# EAGLE board femtoBeacon_r2.0.1_PANELIZED_5x10 (EAGLE 7.6.0), part 1 of 18
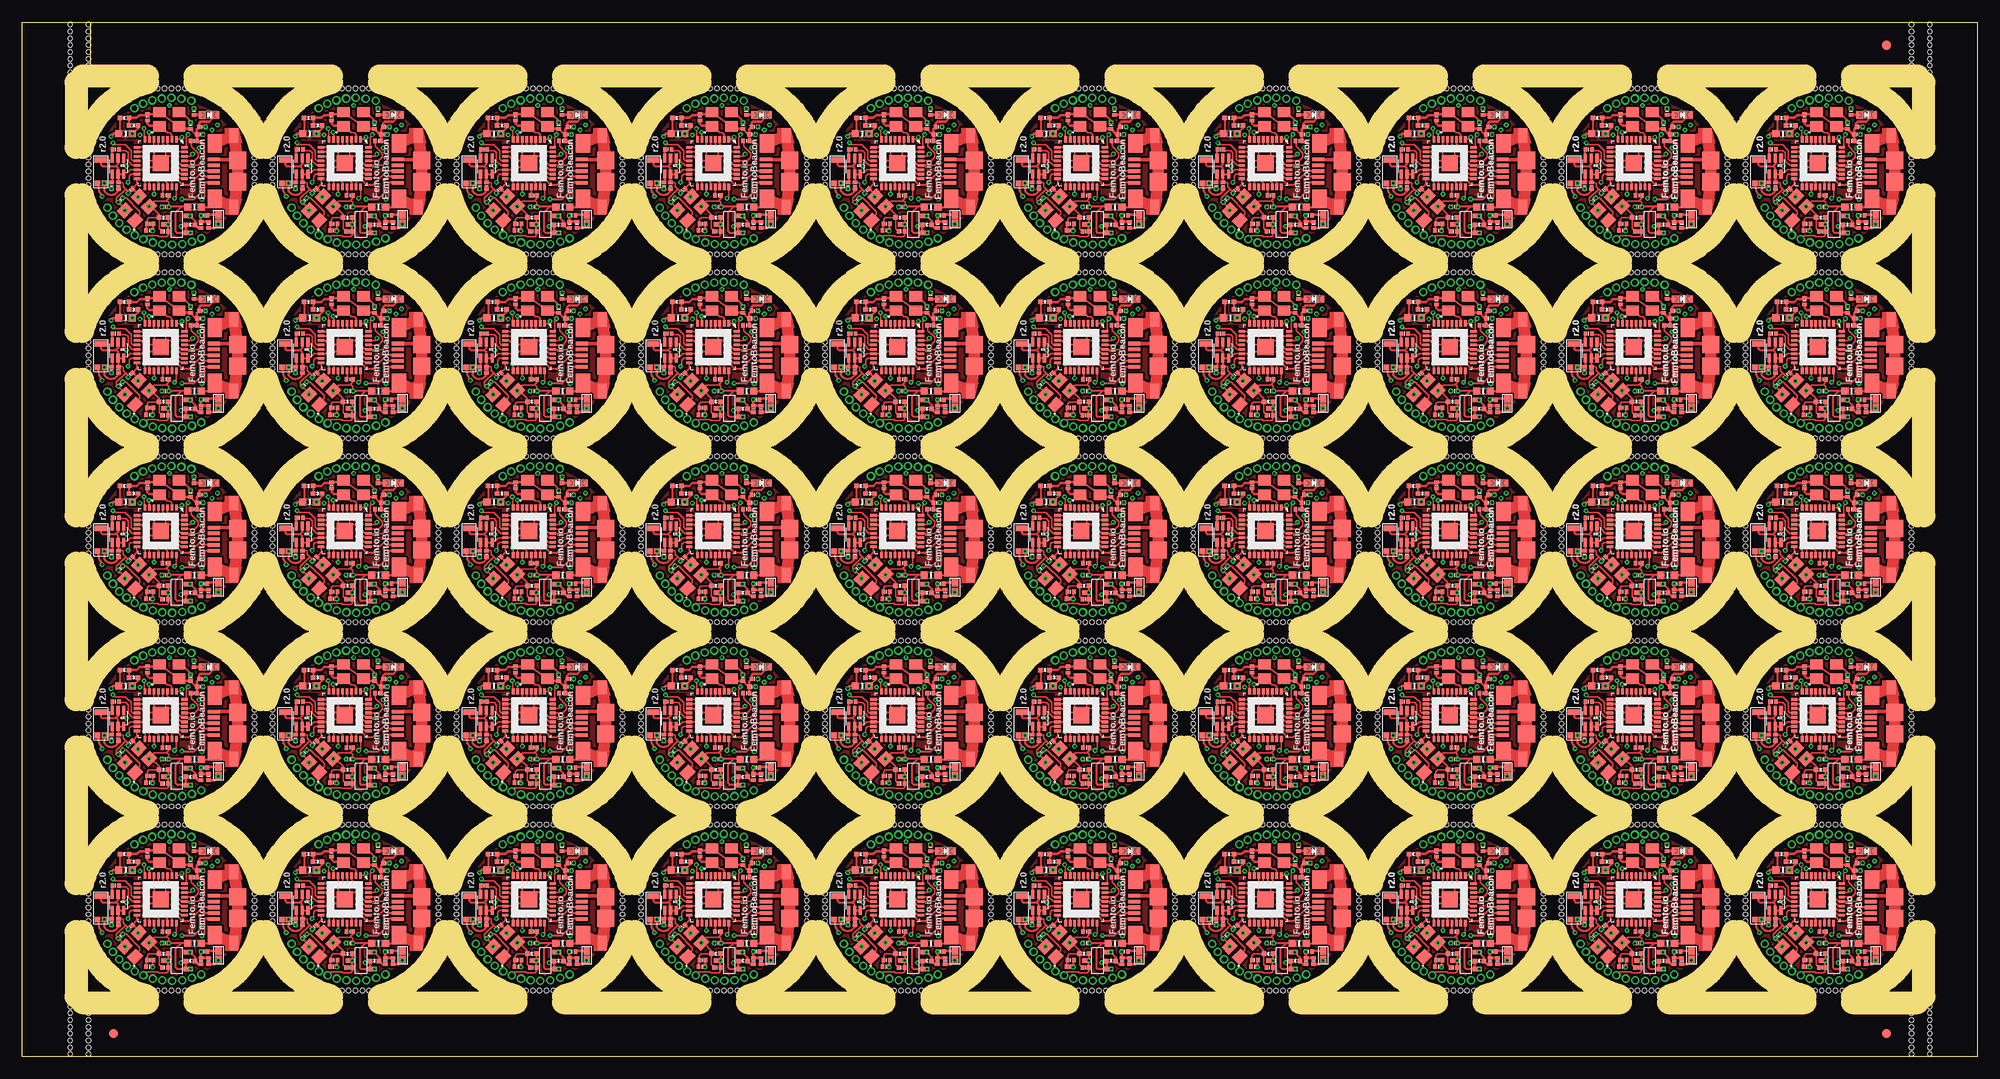
[diagram p0: board, top side]
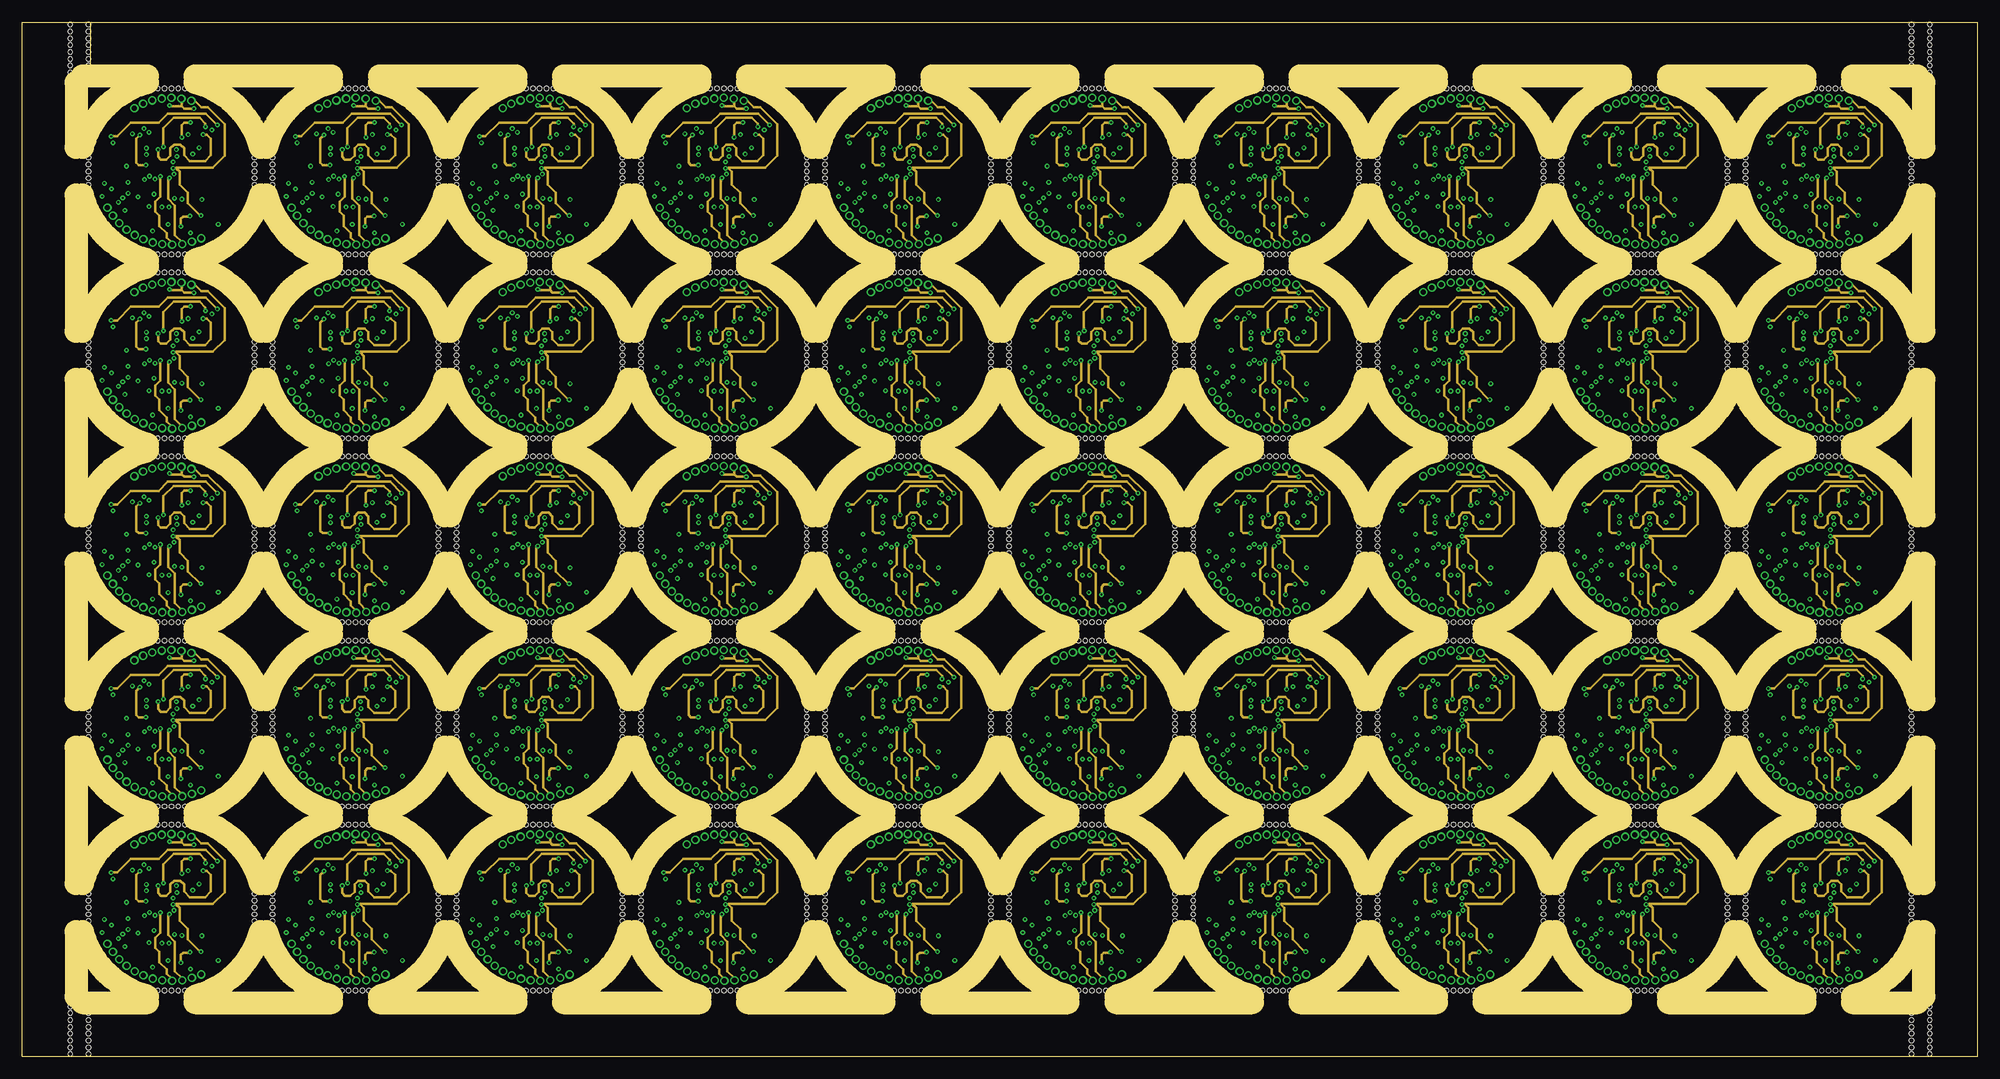
[diagram p1: board, inner layer Route2]
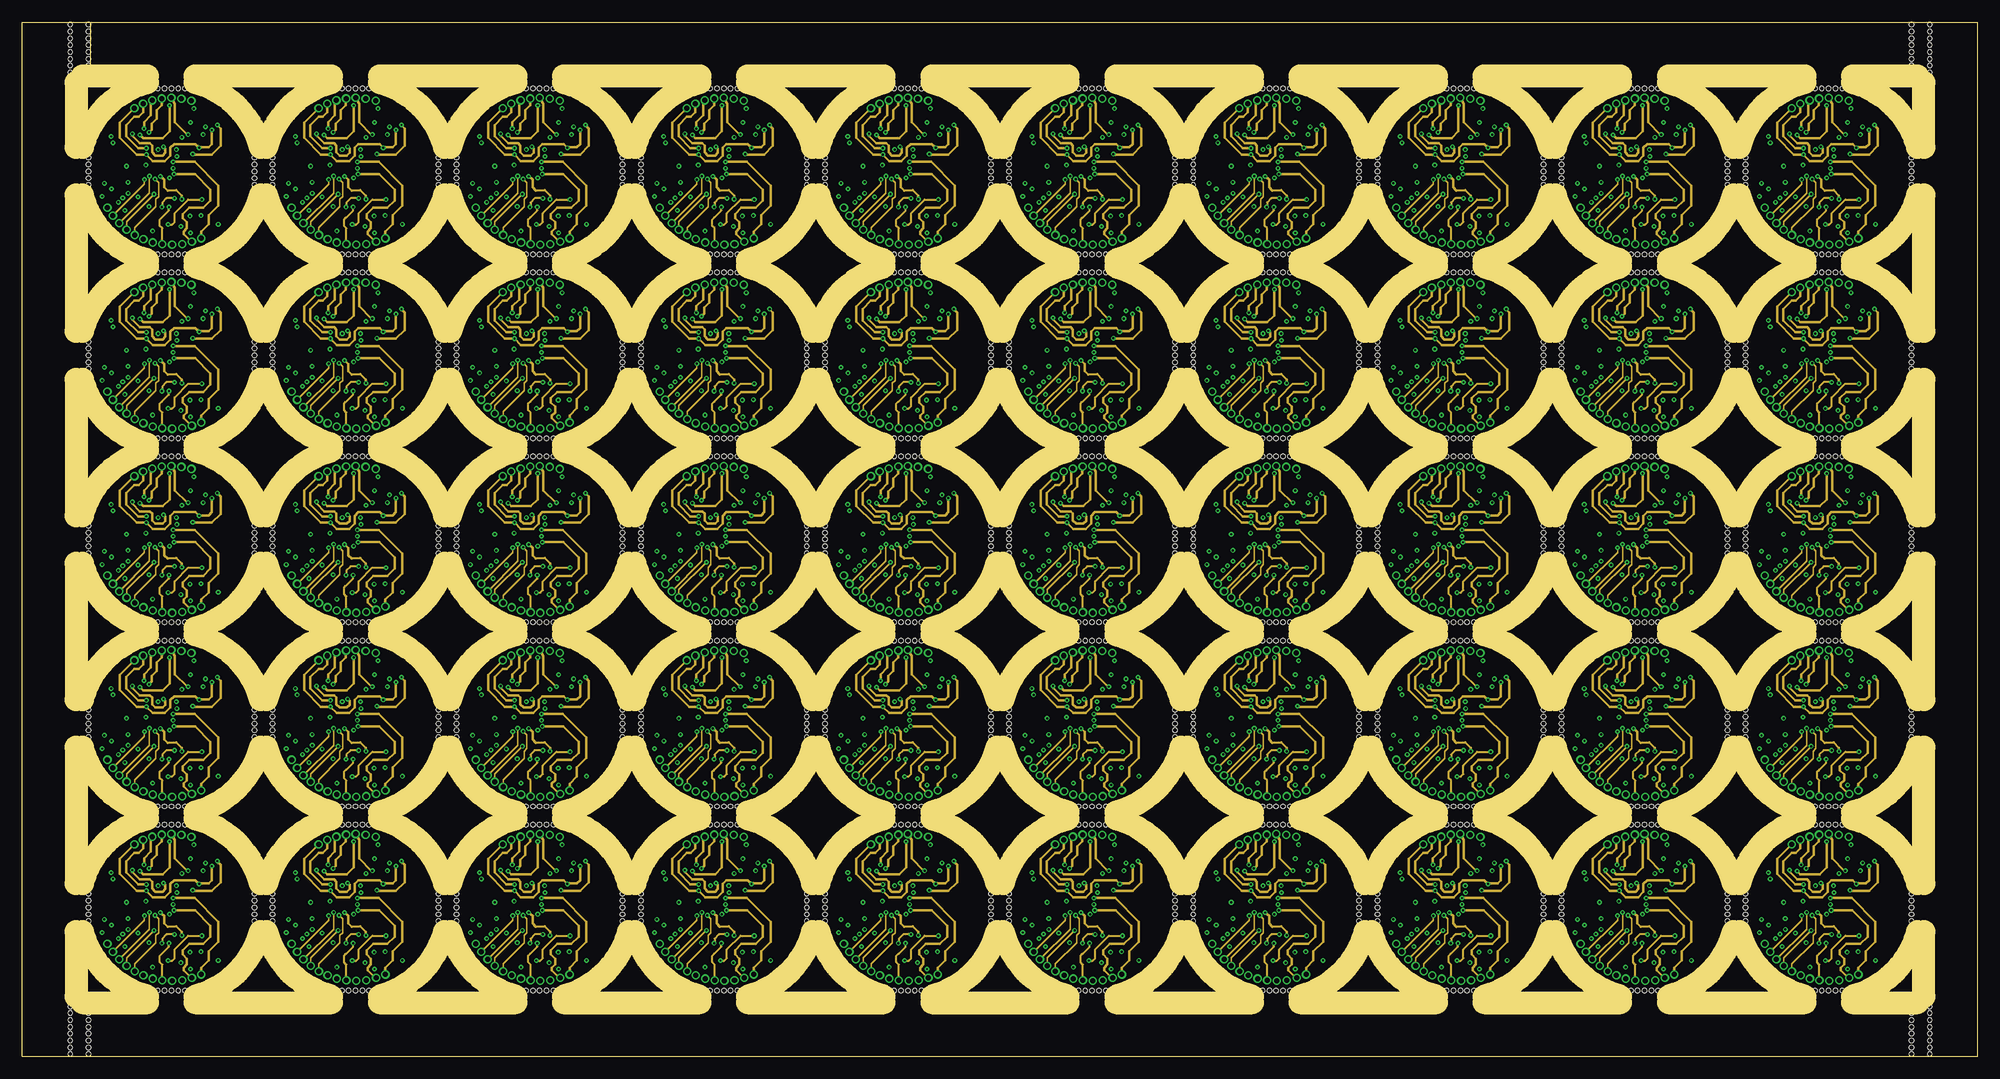
[diagram p2: board, inner layer Route15]
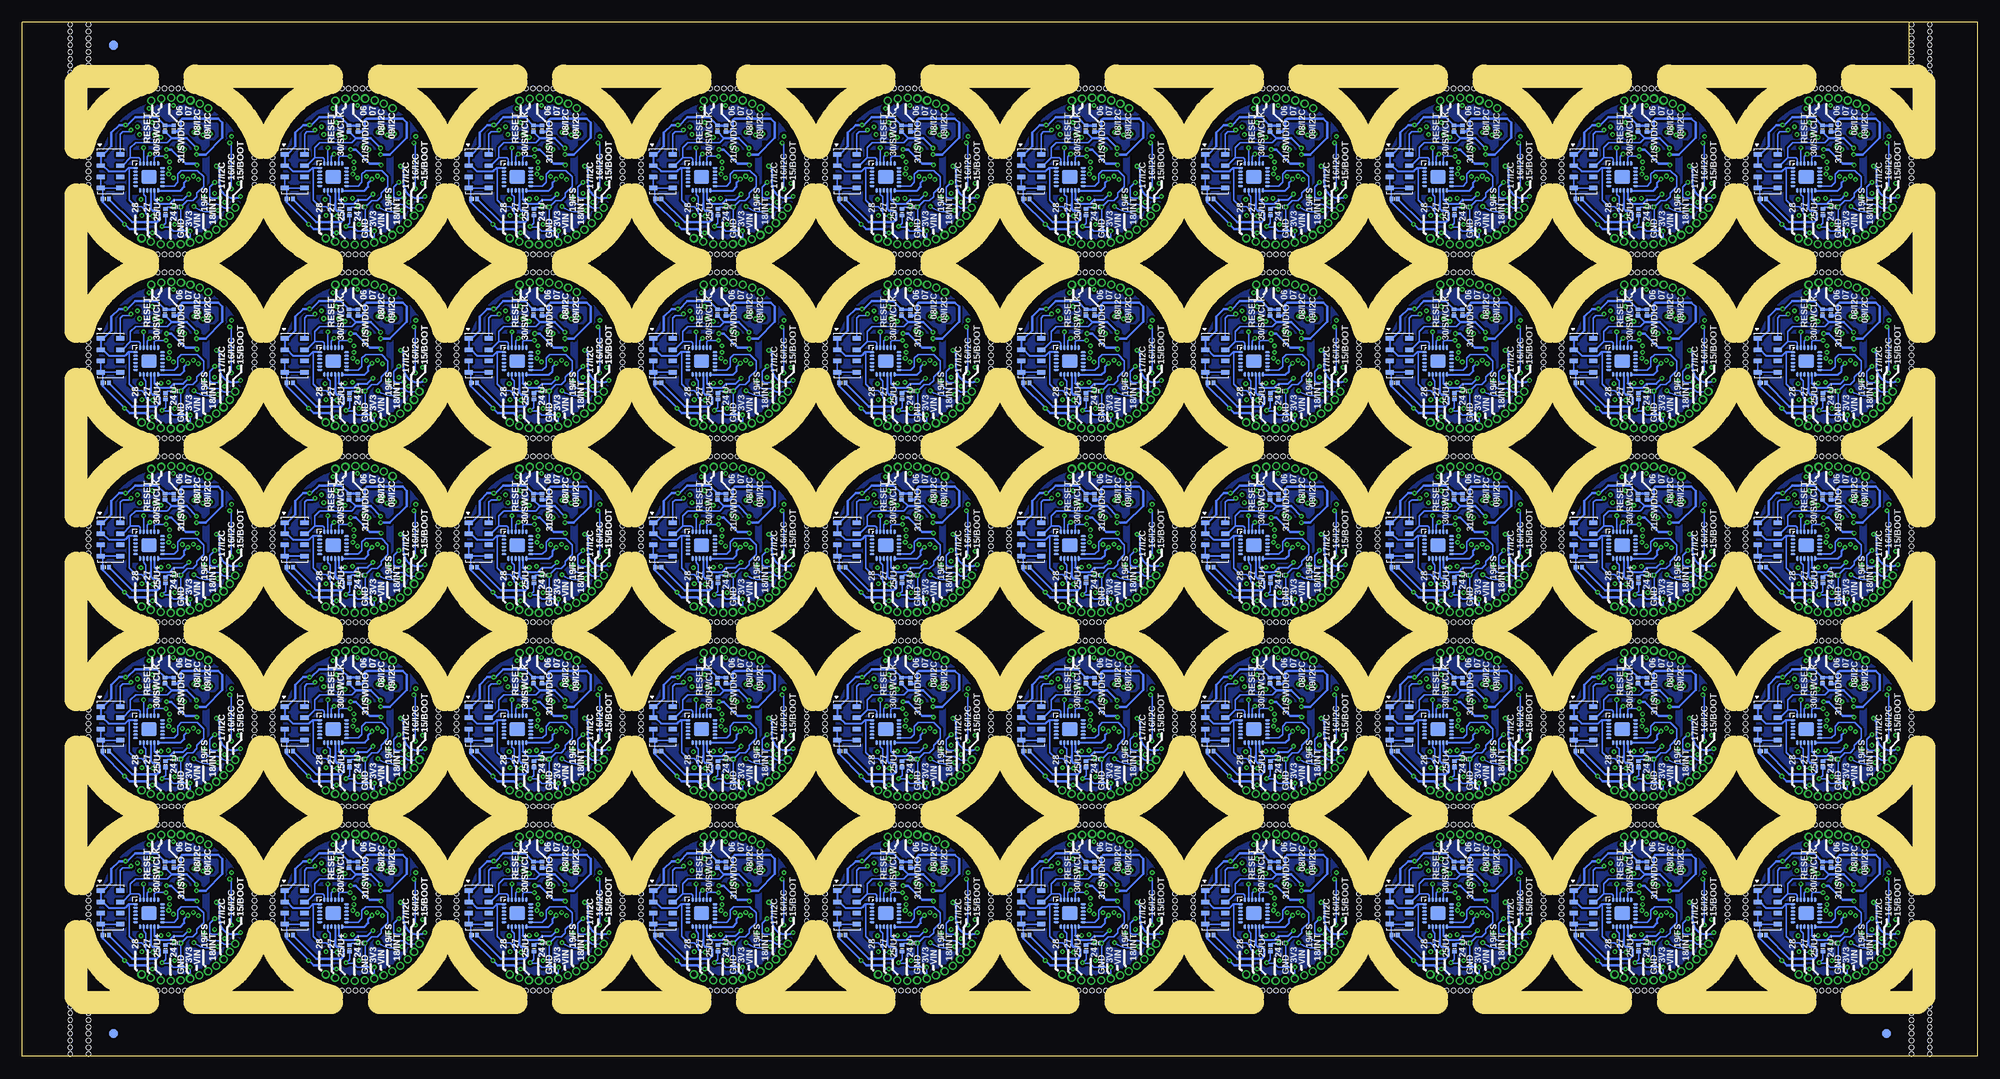
[diagram p3: board, bottom side, seen from below]

Size 218.1 x 115.4 mm. Coordinates in mm from the lower left corner, seen from the top.
Outline: 7.62,110.32 7.62,115.4
Outline: 0,0 0,115.4 218.1,115.4 218.1,0 0,0
Copper layers (1+2*15+16): Top 0.035mm / dielectric 0.7mm / Route2 0.035mm / dielectric 0.15mm / Route15 0.035mm / dielectric 0.2mm / Bottom 0.035mm
Design rules "AQS_custom_4layer": minimum track width 5mil, minimum drill 5mil, track to track 6mil, track to pad 6mil, pad to pad 6mil, via to via 6mil, smd to smd 1mil, copper to edge 15mil, drill to drill 6mil, minimum pad ring 7mil, minimum via ring 3mil, stop-mask expansion 2mil, vias tented up to drill 10mil, thermal gap 10mil
Holes 0.51 mm at 7.37,16.62 7.37,17.38 7.37,18.14 7.37,15.86 7.37,15.1 25.87,16.62 25.87,15.86 25.87,15.1 25.87,17.38 25.87,18.14 16.62,7.37 15.86,7.37 15.1,7.37 17.38,7.37 18.14,7.37 16.62,25.87 17.38,25.87 18.14,25.87 15.86,25.87 15.1,25.87 7.37,37.16 7.37,37.92 7.37,38.68 7.37,36.4 7.37,35.64 25.87,37.16 25.87,36.4 25.87,35.64 25.87,37.92 25.87,38.68 16.62,27.91 15.86,27.91 15.1,27.91 17.38,27.91 18.14,27.91 16.62,46.41 17.38,46.41 18.14,46.41 15.86,46.41 15.1,46.41 7.37,57.7 7.37,58.46 7.37,59.22 7.37,56.94 7.37,56.18 25.87,57.7 25.87,56.94 25.87,56.18 25.87,58.46 25.87,59.22 16.62,48.45 15.86,48.45 15.1,48.45 17.38,48.45 18.14,48.45 16.62,66.95 17.38,66.95 18.14,66.95 15.86,66.95 15.1,66.95 7.37,78.24 7.37,79 7.37,79.76 7.37,77.48 7.37,76.72 25.87,78.24 25.87,77.48 25.87,76.72 25.87,79 25.87,79.76 16.62,68.99 15.86,68.99 15.1,68.99 17.38,68.99 18.14,68.99 16.62,87.49 17.38,87.49 18.14,87.49 15.86,87.49 15.1,87.49 7.37,98.78 7.37,99.54 7.37,100.3 7.37,98.02 7.37,97.26 25.87,98.78 25.87,98.02 25.87,97.26 25.87,99.54 25.87,100.3 16.62,89.53 15.86,89.53 15.1,89.53 17.38,89.53 18.14,89.53 16.62,108.03 17.38,108.03 18.14,108.03 15.86,108.03 15.1,108.03 27.91,16.62 27.91,17.38 27.91,18.14 27.91,15.86 27.91,15.1 46.41,16.62 46.41,15.86 46.41,15.1 46.41,17.38 46.41,18.14 37.16,7.37 36.4,7.37 35.64,7.37 37.92,7.37 38.68,7.37 37.16,25.87 37.92,25.87 38.68,25.87 36.4,25.87 35.64,25.87 27.91,37.16 27.91,37.92 27.91,38.68 27.91,36.4 27.91,35.64 46.41,37.16 46.41,36.4 46.41,35.64 46.41,37.92 46.41,38.68 37.16,27.91 36.4,27.91 35.64,27.91 37.92,27.91 38.68,27.91 37.16,46.41 37.92,46.41 38.68,46.41 36.4,46.41 35.64,46.41 27.91,57.7 27.91,58.46 27.91,59.22 27.91,56.94 27.91,56.18 46.41,57.7 46.41,56.94 46.41,56.18 46.41,58.46 46.41,59.22 37.16,48.45 36.4,48.45 35.64,48.45 37.92,48.45 38.68,48.45 37.16,66.95 37.92,66.95 38.68,66.95 36.4,66.95 35.64,66.95 27.91,78.24 27.91,79 27.91,79.76 27.91,77.48 27.91,76.72 46.41,78.24 46.41,77.48 46.41,76.72 46.41,79 46.41,79.76 37.16,68.99 36.4,68.99 35.64,68.99 37.92,68.99 38.68,68.99 37.16,87.49 37.92,87.49 38.68,87.49 36.4,87.49 35.64,87.49 27.91,98.78 27.91,99.54 27.91,100.3 27.91,98.02 27.91,97.26 46.41,98.78 46.41,98.02 46.41,97.26 46.41,99.54 46.41,100.3 37.16,89.53 36.4,89.53 35.64,89.53 37.92,89.53 38.68,89.53 37.16,108.03 37.92,108.03 38.68,108.03 36.4,108.03 35.64,108.03 48.45,16.62 48.45,17.38 48.45,18.14 48.45,15.86 48.45,15.1 66.95,16.62 66.95,15.86 66.95,15.1 66.95,17.38 66.95,18.14 57.7,7.37 56.94,7.37 56.18,7.37 58.46,7.37 59.22,7.37 57.7,25.87 58.46,25.87 59.22,25.87 56.94,25.87 56.18,25.87 48.45,37.16 48.45,37.92 48.45,38.68 48.45,36.4 48.45,35.64 66.95,37.16 66.95,36.4 66.95,35.64 66.95,37.92 66.95,38.68 57.7,27.91 56.94,27.91 56.18,27.91 58.46,27.91 59.22,27.91 57.7,46.41 58.46,46.41 59.22,46.41 56.94,46.41 56.18,46.41 48.45,57.7 48.45,58.46 48.45,59.22 48.45,56.94 48.45,56.18 66.95,57.7 66.95,56.94 66.95,56.18 66.95,58.46 66.95,59.22 57.7,48.45 56.94,48.45 56.18,48.45 58.46,48.45 59.22,48.45 57.7,66.95 58.46,66.95 59.22,66.95 56.94,66.95 56.18,66.95 48.45,78.24 48.45,79 48.45,79.76 48.45,77.48 48.45,76.72 66.95,78.24 66.95,77.48 66.95,76.72 66.95,79 66.95,79.76 57.7,68.99 56.94,68.99 56.18,68.99 58.46,68.99 59.22,68.99 57.7,87.49 58.46,87.49 59.22,87.49 56.94,87.49 56.18,87.49 48.45,98.78 48.45,99.54 48.45,100.3 48.45,98.02 48.45,97.26 66.95,98.78 66.95,98.02 66.95,97.26 66.95,99.54 66.95,100.3 57.7,89.53 56.94,89.53 56.18,89.53 58.46,89.53 59.22,89.53 57.7,108.03 58.46,108.03 59.22,108.03 56.94,108.03 56.18,108.03 68.99,16.62 68.99,17.38 68.99,18.14 68.99,15.86 68.99,15.1 87.49,16.62 87.49,15.86 87.49,15.1 87.49,17.38 87.49,18.14 78.24,7.37 77.48,7.37 76.72,7.37 79,7.37 79.76,7.37 78.24,25.87 79,25.87 79.76,25.87 77.48,25.87 76.72,25.87 68.99,37.16 68.99,37.92 68.99,38.68 68.99,36.4 68.99,35.64 87.49,37.16 87.49,36.4 87.49,35.64 87.49,37.92 87.49,38.68 78.24,27.91 77.48,27.91 76.72,27.91 79,27.91 79.76,27.91 78.24,46.41 79,46.41 79.76,46.41 77.48,46.41 76.72,46.41 68.99,57.7 68.99,58.46 68.99,59.22 68.99,56.94 68.99,56.18 87.49,57.7 87.49,56.94 87.49,56.18 87.49,58.46 87.49,59.22 78.24,48.45 77.48,48.45 76.72,48.45 79,48.45 79.76,48.45 78.24,66.95 79,66.95 79.76,66.95 77.48,66.95 76.72,66.95 68.99,78.24 68.99,79 68.99,79.76 68.99,77.48 68.99,76.72 87.49,78.24 87.49,77.48 87.49,76.72 87.49,79 87.49,79.76 78.24,68.99 77.48,68.99 76.72,68.99 79,68.99 79.76,68.99 78.24,87.49 79,87.49 79.76,87.49 77.48,87.49 76.72,87.49 68.99,98.78 68.99,99.54 68.99,100.3 68.99,98.02 68.99,97.26 87.49,98.78 87.49,98.02 87.49,97.26 87.49,99.54 87.49,100.3 78.24,89.53 77.48,89.53 76.72,89.53 79,89.53 79.76,89.53 78.24,108.03 79,108.03 79.76,108.03 77.48,108.03 76.72,108.03 89.53,16.62 89.53,17.38 89.53,18.14 89.53,15.86 89.53,15.1 108.03,16.62 108.03,15.86 108.03,15.1 108.03,17.38 108.03,18.14 98.78,7.37 98.02,7.37 97.26,7.37 99.54,7.37 100.3,7.37 98.78,25.87 99.54,25.87 100.3,25.87 98.02,25.87 97.26,25.87 89.53,37.16 89.53,37.92 89.53,38.68 89.53,36.4 89.53,35.64 108.03,37.16 108.03,36.4 108.03,35.64 108.03,37.92 108.03,38.68 98.78,27.91 98.02,27.91 97.26,27.91 99.54,27.91 100.3,27.91 98.78,46.41 99.54,46.41 100.3,46.41 98.02,46.41 97.26,46.41 89.53,57.7 89.53,58.46 89.53,59.22 89.53,56.94 89.53,56.18 108.03,57.7 108.03,56.94 108.03,56.18 108.03,58.46 108.03,59.22 98.78,48.45 98.02,48.45 97.26,48.45 99.54,48.45 100.3,48.45 98.78,66.95 99.54,66.95 100.3,66.95 98.02,66.95 97.26,66.95 89.53,78.24 89.53,79 89.53,79.76 89.53,77.48 89.53,76.72 108.03,78.24 108.03,77.48 108.03,76.72 108.03,79 108.03,79.76 98.78,68.99 98.02,68.99 97.26,68.99 99.54,68.99 100.3,68.99 98.78,87.49 99.54,87.49 100.3,87.49 98.02,87.49 97.26,87.49 89.53,98.78 89.53,99.54 89.53,100.3 89.53,98.02 89.53,97.26 108.03,98.78 108.03,98.02 108.03,97.26 108.03,99.54 108.03,100.3 98.78,89.53 98.02,89.53 97.26,89.53 99.54,89.53 100.3,89.53 98.78,108.03 99.54,108.03 100.3,108.03 98.02,108.03 97.26,108.03 110.07,16.62 110.07,17.38 110.07,18.14 110.07,15.86 110.07,15.1 128.57,16.62 128.57,15.86 128.57,15.1 128.57,17.38 128.57,18.14 119.32,7.37 118.56,7.37 117.8,7.37 120.08,7.37 120.84,7.37 119.32,25.87 120.08,25.87 120.84,25.87 118.56,25.87 117.8,25.87 110.07,37.16 110.07,37.92 110.07,38.68 110.07,36.4 110.07,35.64 128.57,37.16 128.57,36.4 128.57,35.64 128.57,37.92 128.57,38.68 119.32,27.91 118.56,27.91 117.8,27.91 120.08,27.91 120.84,27.91 119.32,46.41 120.08,46.41 120.84,46.41 118.56,46.41 117.8,46.41 110.07,57.7 110.07,58.46 110.07,59.22 110.07,56.94 110.07,56.18 128.57,57.7 128.57,56.94 128.57,56.18 128.57,58.46 128.57,59.22 119.32,48.45 118.56,48.45 117.8,48.45 120.08,48.45 120.84,48.45 119.32,66.95 120.08,66.95 120.84,66.95 118.56,66.95 117.8,66.95 110.07,78.24 110.07,79 110.07,79.76 110.07,77.48 110.07,76.72 128.57,78.24 128.57,77.48 128.57,76.72 128.57,79 128.57,79.76 119.32,68.99 118.56,68.99 117.8,68.99 120.08,68.99 120.84,68.99 119.32,87.49 120.08,87.49 120.84,87.49 118.56,87.49 117.8,87.49 110.07,98.78 110.07,99.54 110.07,100.3 110.07,98.02 110.07,97.26 128.57,98.78 128.57,98.02 128.57,97.26 128.57,99.54 128.57,100.3 119.32,89.53 118.56,89.53 117.8,89.53 120.08,89.53 120.84,89.53 119.32,108.03 120.08,108.03 120.84,108.03 118.56,108.03 117.8,108.03 130.61,16.62 130.61,17.38 130.61,18.14 130.61,15.86 130.61,15.1 149.11,16.62 149.11,15.86 149.11,15.1 149.11,17.38 149.11,18.14 139.86,7.37 139.1,7.37 138.34,7.37 140.62,7.37 141.38,7.37 139.86,25.87 140.62,25.87 141.38,25.87 139.1,25.87 138.34,25.87 130.61,37.16 130.61,37.92 130.61,38.68 130.61,36.4 130.61,35.64 149.11,37.16 149.11,36.4 149.11,35.64 149.11,37.92 149.11,38.68 139.86,27.91 139.1,27.91 138.34,27.91 140.62,27.91 141.38,27.91 139.86,46.41 140.62,46.41 141.38,46.41 139.1,46.41 138.34,46.41 130.61,57.7 130.61,58.46 130.61,59.22 130.61,56.94 130.61,56.18 149.11,57.7 149.11,56.94 149.11,56.18 149.11,58.46 149.11,59.22 139.86,48.45 139.1,48.45 138.34,48.45 140.62,48.45 141.38,48.45 139.86,66.95 140.62,66.95 141.38,66.95 139.1,66.95 138.34,66.95 130.61,78.24 130.61,79 130.61,79.76 130.61,77.48 130.61,76.72 149.11,78.24 149.11,77.48 149.11,76.72 149.11,79 149.11,79.76 139.86,68.99 139.1,68.99 138.34,68.99 140.62,68.99 141.38,68.99 139.86,87.49 140.62,87.49 141.38,87.49 139.1,87.49 138.34,87.49 130.61,98.78 130.61,99.54 130.61,100.3 130.61,98.02 130.61,97.26 149.11,98.78 149.11,98.02 149.11,97.26 149.11,99.54 149.11,100.3 139.86,89.53 139.1,89.53 138.34,89.53 140.62,89.53 141.38,89.53 139.86,108.03 140.62,108.03 141.38,108.03 139.1,108.03 138.34,108.03 151.15,16.62 151.15,17.38 151.15,18.14 151.15,15.86 151.15,15.1 169.65,16.62 169.65,15.86 169.65,15.1 169.65,17.38 169.65,18.14 160.4,7.37 159.64,7.37 158.88,7.37 161.16,7.37 161.92,7.37 160.4,25.87 161.16,25.87 161.92,25.87 159.64,25.87 158.88,25.87 151.15,37.16 151.15,37.92 151.15,38.68 151.15,36.4 151.15,35.64 169.65,37.16 169.65,36.4 169.65,35.64 169.65,37.92 169.65,38.68 160.4,27.91 159.64,27.91 158.88,27.91 161.16,27.91 161.92,27.91 160.4,46.41 161.16,46.41 161.92,46.41 159.64,46.41 158.88,46.41 151.15,57.7 151.15,58.46 151.15,59.22 151.15,56.94 151.15,56.18 169.65,57.7 169.65,56.94 169.65,56.18 169.65,58.46 169.65,59.22 160.4,48.45 159.64,48.45 158.88,48.45 161.16,48.45 161.92,48.45 160.4,66.95 161.16,66.95 161.92,66.95 159.64,66.95 158.88,66.95 151.15,78.24 151.15,79 151.15,79.76 151.15,77.48 151.15,76.72 169.65,78.24 169.65,77.48 169.65,76.72 169.65,79 169.65,79.76 160.4,68.99 159.64,68.99 158.88,68.99 161.16,68.99 161.92,68.99 160.4,87.49 161.16,87.49 161.92,87.49 159.64,87.49 158.88,87.49 151.15,98.78 151.15,99.54 151.15,100.3 151.15,98.02 151.15,97.26 169.65,98.78 169.65,98.02 169.65,97.26 169.65,99.54 169.65,100.3 160.4,89.53 159.64,89.53 158.88,89.53 161.16,89.53 161.92,89.53 160.4,108.03 161.16,108.03 161.92,108.03 159.64,108.03 158.88,108.03 171.69,16.62 171.69,17.38 171.69,18.14 171.69,15.86 171.69,15.1 190.19,16.62 190.19,15.86 190.19,15.1 190.19,17.38 190.19,18.14 180.94,7.37 180.18,7.37 179.42,7.37 181.7,7.37 182.46,7.37 180.94,25.87 181.7,25.87 182.46,25.87 180.18,25.87 179.42,25.87 171.69,37.16 171.69,37.92 171.69,38.68 171.69,36.4 171.69,35.64 190.19,37.16 190.19,36.4 190.19,35.64 190.19,37.92 190.19,38.68 180.94,27.91 180.18,27.91 179.42,27.91 181.7,27.91 182.46,27.91 180.94,46.41 181.7,46.41 182.46,46.41 180.18,46.41 179.42,46.41 171.69,57.7 171.69,58.46 171.69,59.22 171.69,56.94 171.69,56.18 190.19,57.7 190.19,56.94 190.19,56.18 190.19,58.46 190.19,59.22 180.94,48.45 180.18,48.45 179.42,48.45 181.7,48.45 182.46,48.45 180.94,66.95 181.7,66.95 182.46,66.95 180.18,66.95 179.42,66.95 171.69,78.24 171.69,79 171.69,79.76 171.69,77.48 171.69,76.72 190.19,78.24 190.19,77.48 190.19,76.72 190.19,79 190.19,79.76 180.94,68.99 180.18,68.99 179.42,68.99 181.7,68.99 182.46,68.99 180.94,87.49 181.7,87.49 182.46,87.49 180.18,87.49 179.42,87.49 171.69,98.78 171.69,99.54 171.69,100.3 171.69,98.02 171.69,97.26 190.19,98.78 190.19,98.02 190.19,97.26 190.19,99.54 190.19,100.3 180.94,89.53 180.18,89.53 179.42,89.53 181.7,89.53 182.46,89.53 180.94,108.03 181.7,108.03 182.46,108.03 180.18,108.03 179.42,108.03 192.23,16.62 192.23,17.38 192.23,18.14 192.23,15.86 192.23,15.1 210.73,16.62 210.73,15.86 210.73,15.1 210.73,17.38 210.73,18.14 201.48,7.37 200.72,7.37 199.96,7.37 202.24,7.37 203,7.37 201.48,25.87 202.24,25.87 203,25.87 200.72,25.87 199.96,25.87 192.23,37.16 192.23,37.92 192.23,38.68 192.23,36.4 192.23,35.64 210.73,37.16 210.73,36.4 210.73,35.64 210.73,37.92 210.73,38.68 201.48,27.91 200.72,27.91 199.96,27.91 202.24,27.91 203,27.91 201.48,46.41 202.24,46.41 203,46.41 200.72,46.41 199.96,46.41 192.23,57.7 192.23,58.46 192.23,59.22 192.23,56.94 192.23,56.18 210.73,57.7 210.73,56.94 210.73,56.18 210.73,58.46 210.73,59.22 201.48,48.45 200.72,48.45 199.96,48.45 202.24,48.45 203,48.45 201.48,66.95 202.24,66.95 203,66.95 200.72,66.95 199.96,66.95 192.23,78.24 192.23,79 192.23,79.76 192.23,77.48 192.23,76.72 210.73,78.24 210.73,77.48 210.73,76.72 210.73,79 210.73,79.76 201.48,68.99 200.72,68.99 199.96,68.99 202.24,68.99 203,68.99 201.48,87.49 202.24,87.49 203,87.49 200.72,87.49 199.96,87.49 192.23,98.78 192.23,99.54 192.23,100.3 192.23,98.02 192.23,97.26 210.73,98.78 210.73,98.02 210.73,97.26 210.73,99.54 210.73,100.3 201.48,89.53 200.72,89.53 199.96,89.53 202.24,89.53 203,89.53 201.48,108.03 202.24,108.03 203,108.03 200.72,108.03 199.96,108.03 7.37,112.86 7.37,113.62 7.37,114.38 7.37,112.1 7.37,111.34 5.33,112.86 5.33,113.62 5.33,114.38 5.33,112.1 5.33,111.34 5.33,110.57 5.33,109.81 7.37,110.57 5.33,115.15 7.37,115.15 5.33,2.54 7.37,2.54 5.33,1.78 5.33,1.02 5.33,3.3 5.33,4.06 5.33,4.83 5.33,5.59 5.33,0.25 7.37,3.3 7.37,4.06 7.37,4.83 7.37,1.78 7.37,1.02 7.37,0.25 210.73,112.86 210.73,113.62 210.73,114.38 210.73,112.1 210.73,111.34 210.73,110.57 210.73,115.15 212.77,112.86 212.77,113.62 212.77,114.38 212.77,115.15 212.77,112.1 212.77,111.34 212.77,110.57 212.77,109.81 210.73,2.54 210.73,3.3 210.73,4.06 210.73,4.83 210.73,1.78 210.73,1.02 210.73,0.25 212.77,2.54 212.77,3.3 212.77,4.06 212.77,4.83 212.77,5.59 212.77,1.78 212.77,1.02 212.77,0.25
Milling: 234 lines

## Footprints (pad centres in the part's own frame; a part is rotated, then mirrored left to right if it is on the bottom)
ANT_BAR = smd 0.62 x 0.61: 1 -1.3,0.37; 2 -1.3,-0.38 | smd 0.62 x 1.36: 3 1.3,0
0805_BALUN = smd 1 x 0.35: 1 -0.9,0.65; 2 -0.9,0; 3 -0.9,-0.65; 4 0.9,-0.65; 5 0.9,0; 6 0.9,0.65
MS5611-01BA03 = smd 0.9 x 0.5: 1 -1.1,1.875; 2 -1.1,0.625; 3 -1.1,-0.625; 4 -1.1,-1.875; 5 1.1,-1.875; 6 1.1,-0.625; 7 1.1,0.625; 8 1.1,1.875
SPST_SMD = smd 0.889 x 0.699: 1 -0.508,0; 2 0.508,0
PART = smd 0.4 x 0.5: 1 -0.35,0; 2 0.35,0
_0402MP = smd 0.5 x 0.5: 1 -0.508,0; 2 0.508,0
_0603MP = smd 0.8 x 0.8: 1 -0.762,0; 2 0.762,0
FIDUCIAL_1MM = smd 1 x 1: 1 0,0
QFN32 = smd 0.7 x 0.3: 1 -2.65,1.75; 2 -2.65,1.25; 3 -2.65,0.75; 4 -2.65,0.25; 5 -2.65,-0.25; 6 -2.65,-0.75; 7 -2.65,-1.25; 8 -2.65,-1.75; 17 2.65,-1.75; 18 2.65,-1.25; 19 2.65,-0.75; 20 2.65,-0.25; 21 2.65,0.25; 22 2.65,0.75; 23 2.65,1.25; 24 2.65,1.75 | smd 0.3 x 0.7: 9 -1.75,-2.65; 10 -1.25,-2.65; 11 -0.75,-2.65; 12 -0.25,-2.65; 13 0.25,-2.65; 14 0.75,-2.65; 15 1.25,-2.65; 16 1.75,-2.65; 25 1.75,2.65; 26 1.25,2.65; 27 0.75,2.65; 28 0.25,2.65; 29 -0.25,2.65; 30 -0.75,2.65; 31 -1.25,2.65; 32 -1.75,2.65 | smd 1.8 x 1.8: 33 0,0
QFN_3X3MM = smd 0.6 x 0.25: P$1 -1.5,1; P$2 -1.5,0.6; P$3 -1.5,0.2; P$4 -1.5,-0.2; P$5 -1.5,-0.6; P$6 -1.5,-1; P$13 1.5,-1; P$14 1.5,-0.6; P$15 1.5,-0.2; P$16 1.5,0.2; P$17 1.5,0.6; P$18 1.5,1 | smd 0.25 x 0.6: P$7 -1,-1.5; P$8 -0.6,-1.5; P$9 -0.2,-1.5; P$10 0.2,-1.5; P$11 0.6,-1.5; P$12 1,-1.5; P$19 1,1.5; P$20 0.6,1.5; P$21 0.2,1.5; P$22 -0.2,1.5; P$23 -0.6,1.5; P$24 -1,1.5 | smd 1.7 x 1.54: P$25 0,0
MCP1700T-3302E/TT = smd 0.5 x 1: GND -0.95,-1.25; VIN 0,1.25; VOUT 0.95,-1.25
CHIPLED_0603_NOOUTLINE = smd 0.8 x 0.8: A 0,-0.75; C 0,0.75
1X1_ROUND = drill 0.559 pad 0.864: P$1 0,0
USB_MICROB_PACKAGE = smd 0.4 x 1.35: 1 -1.3,1.47; 2 -0.64,1.47; 3 0,1.47; 4 0.66,1.47; 5 1.3,1.47 | smd 2.1 x 1.6: 6 -3.1,1.35; 11 3.1,1.35 | smd 1.6 x 1: 7 -4,-0.8; 10 4,-0.8 | smd 1.9 x 1.9: 8 -1.2,-1.2; 9 1.2,-1.2
TSX-3225 = smd 1.4 x 1.15: 1 -1.1,-0.8; 2 1.1,-0.8; 3 1.1,0.8; 4 -1.1,0.8

## Placement (x,y rotation side)
ANT  PULSE_ANT_2.4GHZ  [ANT_BAR]  8.76,16.59 90 top
ANT1  PULSE_ANT_2.4GHZ  [ANT_BAR]  8.76,37.13 90 top
ANT2  PULSE_ANT_2.4GHZ  [ANT_BAR]  8.76,57.67 90 top
ANT3  PULSE_ANT_2.4GHZ  [ANT_BAR]  8.76,78.21 90 top
ANT4  PULSE_ANT_2.4GHZ  [ANT_BAR]  8.76,98.75 90 top
ANT5  PULSE_ANT_2.4GHZ  [ANT_BAR]  29.3,16.59 90 top
ANT6  PULSE_ANT_2.4GHZ  [ANT_BAR]  29.3,37.13 90 top
ANT7  PULSE_ANT_2.4GHZ  [ANT_BAR]  29.3,57.67 90 top
ANT8  PULSE_ANT_2.4GHZ  [ANT_BAR]  29.3,78.21 90 top
ANT9  PULSE_ANT_2.4GHZ  [ANT_BAR]  29.3,98.75 90 top
ANT10  PULSE_ANT_2.4GHZ  [ANT_BAR]  49.84,16.59 90 top
ANT11  PULSE_ANT_2.4GHZ  [ANT_BAR]  49.84,37.13 90 top
ANT12  PULSE_ANT_2.4GHZ  [ANT_BAR]  49.84,57.67 90 top
ANT13  PULSE_ANT_2.4GHZ  [ANT_BAR]  49.84,78.21 90 top
ANT14  PULSE_ANT_2.4GHZ  [ANT_BAR]  49.84,98.75 90 top
ANT15  PULSE_ANT_2.4GHZ  [ANT_BAR]  70.38,16.59 90 top
ANT16  PULSE_ANT_2.4GHZ  [ANT_BAR]  70.38,37.13 90 top
ANT17  PULSE_ANT_2.4GHZ  [ANT_BAR]  70.38,57.67 90 top
ANT18  PULSE_ANT_2.4GHZ  [ANT_BAR]  70.38,78.21 90 top
ANT19  PULSE_ANT_2.4GHZ  [ANT_BAR]  70.38,98.75 90 top
ANT20  PULSE_ANT_2.4GHZ  [ANT_BAR]  90.92,16.59 90 top
ANT21  PULSE_ANT_2.4GHZ  [ANT_BAR]  90.92,37.13 90 top
ANT22  PULSE_ANT_2.4GHZ  [ANT_BAR]  90.92,57.67 90 top
ANT23  PULSE_ANT_2.4GHZ  [ANT_BAR]  90.92,78.21 90 top
ANT24  PULSE_ANT_2.4GHZ  [ANT_BAR]  90.92,98.75 90 top
ANT25  PULSE_ANT_2.4GHZ  [ANT_BAR]  111.46,16.59 90 top
ANT26  PULSE_ANT_2.4GHZ  [ANT_BAR]  111.46,37.13 90 top
ANT27  PULSE_ANT_2.4GHZ  [ANT_BAR]  111.46,57.67 90 top
ANT28  PULSE_ANT_2.4GHZ  [ANT_BAR]  111.46,78.21 90 top
ANT29  PULSE_ANT_2.4GHZ  [ANT_BAR]  111.46,98.75 90 top
ANT30  PULSE_ANT_2.4GHZ  [ANT_BAR]  132,16.59 90 top
ANT31  PULSE_ANT_2.4GHZ  [ANT_BAR]  132,37.13 90 top
ANT32  PULSE_ANT_2.4GHZ  [ANT_BAR]  132,57.67 90 top
ANT33  PULSE_ANT_2.4GHZ  [ANT_BAR]  132,78.21 90 top
ANT34  PULSE_ANT_2.4GHZ  [ANT_BAR]  132,98.75 90 top
ANT35  PULSE_ANT_2.4GHZ  [ANT_BAR]  152.54,16.59 90 top
ANT36  PULSE_ANT_2.4GHZ  [ANT_BAR]  152.54,37.13 90 top
ANT37  PULSE_ANT_2.4GHZ  [ANT_BAR]  152.54,57.67 90 top
ANT38  PULSE_ANT_2.4GHZ  [ANT_BAR]  152.54,78.21 90 top
ANT39  PULSE_ANT_2.4GHZ  [ANT_BAR]  152.54,98.75 90 top
ANT40  PULSE_ANT_2.4GHZ  [ANT_BAR]  173.08,16.59 90 top
ANT41  PULSE_ANT_2.4GHZ  [ANT_BAR]  173.08,37.13 90 top
ANT42  PULSE_ANT_2.4GHZ  [ANT_BAR]  173.08,57.67 90 top
ANT43  PULSE_ANT_2.4GHZ  [ANT_BAR]  173.08,78.21 90 top
ANT44  PULSE_ANT_2.4GHZ  [ANT_BAR]  173.08,98.75 90 top
ANT45  PULSE_ANT_2.4GHZ  [ANT_BAR]  193.62,16.59 90 top
ANT46  PULSE_ANT_2.4GHZ  [ANT_BAR]  193.62,37.13 90 top
ANT47  PULSE_ANT_2.4GHZ  [ANT_BAR]  193.62,57.67 90 top
ANT48  PULSE_ANT_2.4GHZ  [ANT_BAR]  193.62,78.21 90 top
ANT49  PULSE_ANT_2.4GHZ  [ANT_BAR]  193.62,98.75 90 top
BAL  JOHANSON_2450BM15A0015E  [0805_BALUN]  10.67,17.2 270 top
BAL1  JOHANSON_2450BM15A0015E  [0805_BALUN]  10.67,37.74 270 top
BAL2  JOHANSON_2450BM15A0015E  [0805_BALUN]  10.67,58.28 270 top
BAL3  JOHANSON_2450BM15A0015E  [0805_BALUN]  10.67,78.82 270 top
BAL4  JOHANSON_2450BM15A0015E  [0805_BALUN]  10.67,99.36 270 top
BAL5  JOHANSON_2450BM15A0015E  [0805_BALUN]  31.21,17.2 270 top
BAL6  JOHANSON_2450BM15A0015E  [0805_BALUN]  31.21,37.74 270 top
BAL7  JOHANSON_2450BM15A0015E  [0805_BALUN]  31.21,58.28 270 top
BAL8  JOHANSON_2450BM15A0015E  [0805_BALUN]  31.21,78.82 270 top
BAL9  JOHANSON_2450BM15A0015E  [0805_BALUN]  31.21,99.36 270 top
BAL10  JOHANSON_2450BM15A0015E  [0805_BALUN]  51.75,17.2 270 top
BAL11  JOHANSON_2450BM15A0015E  [0805_BALUN]  51.75,37.74 270 top
BAL12  JOHANSON_2450BM15A0015E  [0805_BALUN]  51.75,58.28 270 top
BAL13  JOHANSON_2450BM15A0015E  [0805_BALUN]  51.75,78.82 270 top
BAL14  JOHANSON_2450BM15A0015E  [0805_BALUN]  51.75,99.36 270 top
BAL15  JOHANSON_2450BM15A0015E  [0805_BALUN]  72.29,17.2 270 top
BAL16  JOHANSON_2450BM15A0015E  [0805_BALUN]  72.29,37.74 270 top
BAL17  JOHANSON_2450BM15A0015E  [0805_BALUN]  72.29,58.28 270 top
BAL18  JOHANSON_2450BM15A0015E  [0805_BALUN]  72.29,78.82 270 top
BAL19  JOHANSON_2450BM15A0015E  [0805_BALUN]  72.29,99.36 270 top
BAL20  JOHANSON_2450BM15A0015E  [0805_BALUN]  92.83,17.2 270 top
BAL21  JOHANSON_2450BM15A0015E  [0805_BALUN]  92.83,37.74 270 top
BAL22  JOHANSON_2450BM15A0015E  [0805_BALUN]  92.83,58.28 270 top
BAL23  JOHANSON_2450BM15A0015E  [0805_BALUN]  92.83,78.82 270 top
BAL24  JOHANSON_2450BM15A0015E  [0805_BALUN]  92.83,99.36 270 top
BAL25  JOHANSON_2450BM15A0015E  [0805_BALUN]  113.37,17.2 270 top
BAL26  JOHANSON_2450BM15A0015E  [0805_BALUN]  113.37,37.74 270 top
BAL27  JOHANSON_2450BM15A0015E  [0805_BALUN]  113.37,58.28 270 top
BAL28  JOHANSON_2450BM15A0015E  [0805_BALUN]  113.37,78.82 270 top
BAL29  JOHANSON_2450BM15A0015E  [0805_BALUN]  113.37,99.36 270 top
BAL30  JOHANSON_2450BM15A0015E  [0805_BALUN]  133.91,17.2 270 top
BAL31  JOHANSON_2450BM15A0015E  [0805_BALUN]  133.91,37.74 270 top
BAL32  JOHANSON_2450BM15A0015E  [0805_BALUN]  133.91,58.28 270 top
BAL33  JOHANSON_2450BM15A0015E  [0805_BALUN]  133.91,78.82 270 top
BAL34  JOHANSON_2450BM15A0015E  [0805_BALUN]  133.91,99.36 270 top
BAL35  JOHANSON_2450BM15A0015E  [0805_BALUN]  154.45,17.2 270 top
BAL36  JOHANSON_2450BM15A0015E  [0805_BALUN]  154.45,37.74 270 top
BAL37  JOHANSON_2450BM15A0015E  [0805_BALUN]  154.45,58.28 270 top
BAL38  JOHANSON_2450BM15A0015E  [0805_BALUN]  154.45,78.82 270 top
BAL39  JOHANSON_2450BM15A0015E  [0805_BALUN]  154.45,99.36 270 top
BAL40  JOHANSON_2450BM15A0015E  [0805_BALUN]  174.99,17.2 270 top
BAL41  JOHANSON_2450BM15A0015E  [0805_BALUN]  174.99,37.74 270 top
BAL42  JOHANSON_2450BM15A0015E  [0805_BALUN]  174.99,58.28 270 top
BAL43  JOHANSON_2450BM15A0015E  [0805_BALUN]  174.99,78.82 270 top
BAL44  JOHANSON_2450BM15A0015E  [0805_BALUN]  174.99,99.36 270 top
BAL45  JOHANSON_2450BM15A0015E  [0805_BALUN]  195.53,17.2 270 top
BAL46  JOHANSON_2450BM15A0015E  [0805_BALUN]  195.53,37.74 270 top
BAL47  JOHANSON_2450BM15A0015E  [0805_BALUN]  195.53,58.28 270 top
BAL48  JOHANSON_2450BM15A0015E  [0805_BALUN]  195.53,78.82 270 top
BAL49  JOHANSON_2450BM15A0015E  [0805_BALUN]  195.53,99.36 270 top
BARO  MS5611-01BA03  [MS5611-01BA03]  23.41,16.63 0 bottom
BARO1  MS5611-01BA03  [MS5611-01BA03]  23.41,37.17 0 bottom
BARO2  MS5611-01BA03  [MS5611-01BA03]  23.41,57.71 0 bottom
BARO3  MS5611-01BA03  [MS5611-01BA03]  23.41,78.25 0 bottom
BARO4  MS5611-01BA03  [MS5611-01BA03]  23.41,98.79 0 bottom
BARO5  MS5611-01BA03  [MS5611-01BA03]  43.95,16.63 0 bottom
BARO6  MS5611-01BA03  [MS5611-01BA03]  43.95,37.17 0 bottom
BARO7  MS5611-01BA03  [MS5611-01BA03]  43.95,57.71 0 bottom
BARO8  MS5611-01BA03  [MS5611-01BA03]  43.95,78.25 0 bottom
BARO9  MS5611-01BA03  [MS5611-01BA03]  43.95,98.79 0 bottom
BARO10  MS5611-01BA03  [MS5611-01BA03]  64.49,16.63 0 bottom
BARO11  MS5611-01BA03  [MS5611-01BA03]  64.49,37.17 0 bottom
BARO12  MS5611-01BA03  [MS5611-01BA03]  64.49,57.71 0 bottom
BARO13  MS5611-01BA03  [MS5611-01BA03]  64.49,78.25 0 bottom
BARO14  MS5611-01BA03  [MS5611-01BA03]  64.49,98.79 0 bottom
BARO15  MS5611-01BA03  [MS5611-01BA03]  85.03,16.63 0 bottom
BARO16  MS5611-01BA03  [MS5611-01BA03]  85.03,37.17 0 bottom
BARO17  MS5611-01BA03  [MS5611-01BA03]  85.03,57.71 0 bottom
BARO18  MS5611-01BA03  [MS5611-01BA03]  85.03,78.25 0 bottom
BARO19  MS5611-01BA03  [MS5611-01BA03]  85.03,98.79 0 bottom
BARO20  MS5611-01BA03  [MS5611-01BA03]  105.57,16.63 0 bottom
BARO21  MS5611-01BA03  [MS5611-01BA03]  105.57,37.17 0 bottom
BARO22  MS5611-01BA03  [MS5611-01BA03]  105.57,57.71 0 bottom
BARO23  MS5611-01BA03  [MS5611-01BA03]  105.57,78.25 0 bottom
BARO24  MS5611-01BA03  [MS5611-01BA03]  105.57,98.79 0 bottom
BARO25  MS5611-01BA03  [MS5611-01BA03]  126.11,16.63 0 bottom
BARO26  MS5611-01BA03  [MS5611-01BA03]  126.11,37.17 0 bottom
BARO27  MS5611-01BA03  [MS5611-01BA03]  126.11,57.71 0 bottom
BARO28  MS5611-01BA03  [MS5611-01BA03]  126.11,78.25 0 bottom
BARO29  MS5611-01BA03  [MS5611-01BA03]  126.11,98.79 0 bottom
BARO30  MS5611-01BA03  [MS5611-01BA03]  146.65,16.63 0 bottom
BARO31  MS5611-01BA03  [MS5611-01BA03]  146.65,37.17 0 bottom
BARO32  MS5611-01BA03  [MS5611-01BA03]  146.65,57.71 0 bottom
BARO33  MS5611-01BA03  [MS5611-01BA03]  146.65,78.25 0 bottom
BARO34  MS5611-01BA03  [MS5611-01BA03]  146.65,98.79 0 bottom
BARO35  MS5611-01BA03  [MS5611-01BA03]  167.19,16.63 0 bottom
BARO36  MS5611-01BA03  [MS5611-01BA03]  167.19,37.17 0 bottom
BARO37  MS5611-01BA03  [MS5611-01BA03]  167.19,57.71 0 bottom
BARO38  MS5611-01BA03  [MS5611-01BA03]  167.19,78.25 0 bottom
BARO39  MS5611-01BA03  [MS5611-01BA03]  167.19,98.79 0 bottom
BARO40  MS5611-01BA03  [MS5611-01BA03]  187.73,16.63 0 bottom
BARO41  MS5611-01BA03  [MS5611-01BA03]  187.73,37.17 0 bottom
BARO42  MS5611-01BA03  [MS5611-01BA03]  187.73,57.71 0 bottom
BARO43  MS5611-01BA03  [MS5611-01BA03]  187.73,78.25 0 bottom
BARO44  MS5611-01BA03  [MS5611-01BA03]  187.73,98.79 0 bottom
BARO45  MS5611-01BA03  [MS5611-01BA03]  208.27,16.63 0 bottom
BARO46  MS5611-01BA03  [MS5611-01BA03]  208.27,37.17 0 bottom
BARO47  MS5611-01BA03  [MS5611-01BA03]  208.27,57.71 0 bottom
BARO48  MS5611-01BA03  [MS5611-01BA03]  208.27,78.25 0 bottom
BARO49  MS5611-01BA03  [MS5611-01BA03]  208.27,98.79 0 bottom
BTN  DNP  [SPST_SMD]  21.87,11.28 270 top
BTN1  DNP  [SPST_SMD]  21.87,31.82 270 top
BTN2  DNP  [SPST_SMD]  21.87,52.36 270 top
BTN3  DNP  [SPST_SMD]  21.87,72.9 270 top
BTN4  DNP  [SPST_SMD]  21.87,93.44 270 top
BTN5  DNP  [SPST_SMD]  42.41,11.28 270 top
BTN6  DNP  [SPST_SMD]  42.41,31.82 270 top
BTN7  DNP  [SPST_SMD]  42.41,52.36 270 top
BTN8  DNP  [SPST_SMD]  42.41,72.9 270 top
BTN9  DNP  [SPST_SMD]  42.41,93.44 270 top
BTN10  DNP  [SPST_SMD]  62.95,11.28 270 top
BTN11  DNP  [SPST_SMD]  62.95,31.82 270 top
BTN12  DNP  [SPST_SMD]  62.95,52.36 270 top
BTN13  DNP  [SPST_SMD]  62.95,72.9 270 top
BTN14  DNP  [SPST_SMD]  62.95,93.44 270 top
BTN15  DNP  [SPST_SMD]  83.49,11.28 270 top
BTN16  DNP  [SPST_SMD]  83.49,31.82 270 top
BTN17  DNP  [SPST_SMD]  83.49,52.36 270 top
BTN18  DNP  [SPST_SMD]  83.49,72.9 270 top
BTN19  DNP  [SPST_SMD]  83.49,93.44 270 top
BTN20  DNP  [SPST_SMD]  104.03,11.28 270 top
BTN21  DNP  [SPST_SMD]  104.03,31.82 270 top
BTN22  DNP  [SPST_SMD]  104.03,52.36 270 top
BTN23  DNP  [SPST_SMD]  104.03,72.9 270 top
BTN24  DNP  [SPST_SMD]  104.03,93.44 270 top
BTN25  DNP  [SPST_SMD]  124.57,11.28 270 top
BTN26  DNP  [SPST_SMD]  124.57,31.82 270 top
BTN27  DNP  [SPST_SMD]  124.57,52.36 270 top
BTN28  DNP  [SPST_SMD]  124.57,72.9 270 top
BTN29  DNP  [SPST_SMD]  124.57,93.44 270 top
BTN30  DNP  [SPST_SMD]  145.11,11.28 270 top
BTN31  DNP  [SPST_SMD]  145.11,31.82 270 top
BTN32  DNP  [SPST_SMD]  145.11,52.36 270 top
BTN33  DNP  [SPST_SMD]  145.11,72.9 270 top
BTN34  DNP  [SPST_SMD]  145.11,93.44 270 top
BTN35  DNP  [SPST_SMD]  165.65,11.28 270 top
BTN36  DNP  [SPST_SMD]  165.65,31.82 270 top
BTN37  DNP  [SPST_SMD]  165.65,52.36 270 top
BTN38  DNP  [SPST_SMD]  165.65,72.9 270 top
BTN39  DNP  [SPST_SMD]  165.65,93.44 270 top
BTN40  DNP  [SPST_SMD]  186.19,11.28 270 top
BTN41  DNP  [SPST_SMD]  186.19,31.82 270 top
BTN42  DNP  [SPST_SMD]  186.19,52.36 270 top
BTN43  DNP  [SPST_SMD]  186.19,72.9 270 top
BTN44  DNP  [SPST_SMD]  186.19,93.44 270 top
BTN45  DNP  [SPST_SMD]  206.73,11.28 270 top
BTN46  DNP  [SPST_SMD]  206.73,31.82 270 top
BTN47  DNP  [SPST_SMD]  206.73,52.36 270 top
BTN48  DNP  [SPST_SMD]  206.73,72.9 270 top
BTN49  DNP  [SPST_SMD]  206.73,93.44 270 top
C1  0.1uF  [PART]  20.78,10.64 270 top
C2  0.1uF  [PART]  15.98,13.94 0 top
C3  10pF  [PART]  10.95,13.41 45 top
C4  10pF  [PART]  12.04,14.43 225 top
C5  2.2uF  [_0402MP]  18.75,10.67 180 top
C6  2.2uF  [_0402MP]  15.75,11.45 180 top
C7  0.47uF  [PART]  15.9,9.93 180 top
C8  0.1uF  [PART]  20.07,21.59 180 top
C9  0.1uF  [PART]  19.13,19.99 0 top
C10  0.1uF  [PART]  14.25,10.77 180 top
C11  22pF, C0G, 5%  [PART]  10.41,19.05 180 top
C12  22pF, C0G, 5%  [PART]  9.93,15.01 90 top
C13  DNP  [PART]  10.69,15.01 90 top
C14  9pF  [PART]  13.94,22.66 270 top
C15  9pF  [PART]  18.75,21.72 270 top
C16  0.1uF  [PART]  15.95,12.64 0 top
C17  0.1uF  [PART]  19.81,20.73 180 top
C18  0.1uF  [PART]  20.78,31.18 270 top
C19  0.1uF  [PART]  15.98,34.48 0 top
C20  2.2uF  [_0402MP]  18.75,31.21 180 top
C21  10uF  [_0402MP]  11.38,22.58 180 top
C22  10uF  [_0402MP]  12.4,21.74 0 top
C23  2.2uF  [_0402MP]  15.75,31.99 180 top
C24  0.47uF  [PART]  15.9,30.47 180 top
C25  0.1uF  [PART]  17.27,32.61 90 bottom
C26  0.1uF  [PART]  20.07,42.13 180 top
C27  0.1uF  [PART]  19.13,40.53 0 top
C28  0.1uF  [PART]  15.95,33.18 0 top
C29  0.1uF  [PART]  17.27,12.07 90 bottom
C30  0.1uF  [PART]  15.95,12.64 0 bottom
C31  10nF  [PART]  14.15,10.01 0 top
C32  0.1uF  [PART]  23.95,13.54 180 bottom
C33  0.1uF  [PART]  19.81,41.27 180 top
C34  10uF  [_0402MP]  11.38,43.12 180 top
C35  10uF  [_0402MP]  12.4,42.28 0 top
C36  0.1uF  [PART]  14.25,31.31 180 top
C37  10pF  [PART]  10.95,33.95 45 top
C38  10pF  [PART]  12.04,34.97 225 top
C39  22pF, C0G, 5%  [PART]  10.41,39.59 180 top
C40  22pF, C0G, 5%  [PART]  9.93,35.55 90 top
C41  DNP  [PART]  10.69,35.55 90 top
C42  9pF  [PART]  13.94,43.2 270 top
C43  9pF  [PART]  18.75,42.26 270 top
C44  10nF  [PART]  14.15,30.55 0 top
C45  0.1uF  [PART]  15.95,33.18 0 bottom
C46  0.1uF  [PART]  23.95,34.08 180 bottom
C47  0.1uF  [PART]  20.78,51.72 270 top
C48  0.1uF  [PART]  15.98,55.02 0 top
C49  2.2uF  [_0402MP]  18.75,51.75 180 top
C50  2.2uF  [_0402MP]  15.75,52.53 180 top
C51  0.47uF  [PART]  15.9,51.01 180 top
C52  0.1uF  [PART]  17.27,53.15 90 bottom
C53  0.1uF  [PART]  20.07,62.67 180 top
C54  0.1uF  [PART]  19.13,61.07 0 top
C55  0.1uF  [PART]  15.95,53.72 0 top
C56  0.1uF  [PART]  19.81,61.81 180 top
C57  10uF  [_0402MP]  11.38,63.66 180 top
C58  10uF  [_0402MP]  12.4,62.82 0 top
C59  0.1uF  [PART]  14.25,51.85 180 top
C60  10pF  [PART]  10.95,54.49 45 top
C61  10pF  [PART]  12.04,55.51 225 top
C62  22pF, C0G, 5%  [PART]  10.41,60.13 180 top
C63  22pF, C0G, 5%  [PART]  9.93,56.09 90 top
C64  DNP  [PART]  10.69,56.09 90 top
C65  9pF  [PART]  13.94,63.74 270 top
C66  9pF  [PART]  18.75,62.8 270 top
C67  10nF  [PART]  14.15,51.09 0 top
C68  0.1uF  [PART]  15.95,53.72 0 bottom
C69  0.1uF  [PART]  23.95,54.62 180 bottom
C70  0.1uF  [PART]  20.78,72.26 270 top
C71  0.1uF  [PART]  15.98,75.56 0 top
C72  2.2uF  [_0402MP]  18.75,72.29 180 top
C73  2.2uF  [_0402MP]  15.75,73.07 180 top
C74  0.47uF  [PART]  15.9,71.55 180 top
C75  0.1uF  [PART]  17.27,73.69 90 bottom
C76  0.1uF  [PART]  20.07,83.21 180 top
C77  0.1uF  [PART]  19.13,81.61 0 top
C78  0.1uF  [PART]  15.95,74.26 0 top
C79  0.1uF  [PART]  19.81,82.35 180 top
C80  10uF  [_0402MP]  11.38,84.2 180 top
C81  10uF  [_0402MP]  12.4,83.36 0 top
C82  0.1uF  [PART]  14.25,72.39 180 top
C83  10pF  [PART]  10.95,75.03 45 top
C84  10pF  [PART]  12.04,76.05 225 top
C85  22pF, C0G, 5%  [PART]  10.41,80.67 180 top
C86  22pF, C0G, 5%  [PART]  9.93,76.63 90 top
C87  DNP  [PART]  10.69,76.63 90 top
C88  9pF  [PART]  13.94,84.28 270 top
C89  9pF  [PART]  18.75,83.34 270 top
C90  10nF  [PART]  14.15,71.63 0 top
C91  0.1uF  [PART]  15.95,74.26 0 bottom
C92  0.1uF  [PART]  23.95,75.16 180 bottom
C93  0.1uF  [PART]  20.78,92.8 270 top
C94  0.1uF  [PART]  15.98,96.1 0 top
C95  2.2uF  [_0402MP]  18.75,92.83 180 top
C96  2.2uF  [_0402MP]  15.75,93.61 180 top
C97  0.47uF  [PART]  15.9,92.09 180 top
C98  0.1uF  [PART]  17.27,94.23 90 bottom
C99  0.1uF  [PART]  20.07,103.75 180 top
C100  0.1uF  [PART]  19.13,102.15 0 top
C101  0.1uF  [PART]  15.95,94.8 0 top
C102  0.1uF  [PART]  19.81,102.89 180 top
C103  10uF  [_0402MP]  11.38,104.74 180 top
C104  10uF  [_0402MP]  12.4,103.9 0 top
C105  0.1uF  [PART]  14.25,92.93 180 top
C106  10pF  [PART]  10.95,95.57 45 top
C107  10pF  [PART]  12.04,96.59 225 top
C108  22pF, C0G, 5%  [PART]  10.41,101.21 180 top
C109  22pF, C0G, 5%  [PART]  9.93,97.17 90 top
C110  DNP  [PART]  10.69,97.17 90 top
C111  9pF  [PART]  13.94,104.82 270 top
C112  9pF  [PART]  18.75,103.88 270 top
C113  10nF  [PART]  14.15,92.17 0 top
C114  0.1uF  [PART]  15.95,94.8 0 bottom
C115  0.1uF  [PART]  23.95,95.7 180 bottom
C116  0.1uF  [PART]  41.32,10.64 270 top
C117  0.1uF  [PART]  36.52,13.94 0 top
C118  2.2uF  [_0402MP]  39.29,10.67 180 top
C119  2.2uF  [_0402MP]  36.29,11.45 180 top
C120  0.47uF  [PART]  36.44,9.93 180 top
C121  0.1uF  [PART]  37.81,12.07 90 bottom
C122  0.1uF  [PART]  40.61,21.59 180 top
C123  0.1uF  [PART]  39.67,19.99 0 top
C124  0.1uF  [PART]  36.49,12.64 0 top
C125  0.1uF  [PART]  40.35,20.73 180 top
C126  10uF  [_0402MP]  31.92,22.58 180 top
C127  10uF  [_0402MP]  32.94,21.74 0 top
C128  0.1uF  [PART]  34.79,10.77 180 top
C129  10pF  [PART]  31.49,13.41 45 top
C130  10pF  [PART]  32.58,14.43 225 top
C131  22pF, C0G, 5%  [PART]  30.95,19.05 180 top
C132  22pF, C0G, 5%  [PART]  30.47,15.01 90 top
C133  DNP  [PART]  31.23,15.01 90 top
C134  9pF  [PART]  34.48,22.66 270 top
C135  9pF  [PART]  39.29,21.72 270 top
C136  10nF  [PART]  34.69,10.01 0 top
C137  0.1uF  [PART]  36.49,12.64 0 bottom
C138  0.1uF  [PART]  44.49,13.54 180 bottom
C139  0.1uF  [PART]  41.32,31.18 270 top
C140  0.1uF  [PART]  36.52,34.48 0 top
C141  2.2uF  [_0402MP]  39.29,31.21 180 top
C142  2.2uF  [_0402MP]  36.29,31.99 180 top
C143  0.47uF  [PART]  36.44,30.47 180 top
C144  0.1uF  [PART]  37.81,32.61 90 bottom
C145  0.1uF  [PART]  40.61,42.13 180 top
C146  0.1uF  [PART]  39.67,40.53 0 top
C147  0.1uF  [PART]  36.49,33.18 0 top
C148  0.1uF  [PART]  40.35,41.27 180 top
C149  10uF  [_0402MP]  31.92,43.12 180 top
C150  10uF  [_0402MP]  32.94,42.28 0 top
C151  0.1uF  [PART]  34.79,31.31 180 top
C152  10pF  [PART]  31.49,33.95 45 top
C153  10pF  [PART]  32.58,34.97 225 top
C154  22pF, C0G, 5%  [PART]  30.95,39.59 180 top
C155  22pF, C0G, 5%  [PART]  30.47,35.55 90 top
C156  DNP  [PART]  31.23,35.55 90 top
C157  9pF  [PART]  34.48,43.2 270 top
C158  9pF  [PART]  39.29,42.26 270 top
C159  10nF  [PART]  34.69,30.55 0 top
C160  0.1uF  [PART]  36.49,33.18 0 bottom
C161  0.1uF  [PART]  44.49,34.08 180 bottom
C162  0.1uF  [PART]  41.32,51.72 270 top
C163  0.1uF  [PART]  36.52,55.02 0 top
C164  2.2uF  [_0402MP]  39.29,51.75 180 top
C165  2.2uF  [_0402MP]  36.29,52.53 180 top
C166  0.47uF  [PART]  36.44,51.01 180 top
C167  0.1uF  [PART]  37.81,53.15 90 bottom
C168  0.1uF  [PART]  40.61,62.67 180 top
C169  0.1uF  [PART]  39.67,61.07 0 top
C170  0.1uF  [PART]  36.49,53.72 0 top
C171  0.1uF  [PART]  40.35,61.81 180 top
C172  10uF  [_0402MP]  31.92,63.66 180 top
C173  10uF  [_0402MP]  32.94,62.82 0 top
C174  0.1uF  [PART]  34.79,51.85 180 top
C175  10pF  [PART]  31.49,54.49 45 top
C176  10pF  [PART]  32.58,55.51 225 top
C177  22pF, C0G, 5%  [PART]  30.95,60.13 180 top
C178  22pF, C0G, 5%  [PART]  30.47,56.09 90 top
C179  DNP  [PART]  31.23,56.09 90 top
C180  9pF  [PART]  34.48,63.74 270 top
C181  9pF  [PART]  39.29,62.8 270 top
C182  10nF  [PART]  34.69,51.09 0 top
C183  0.1uF  [PART]  36.49,53.72 0 bottom
C184  0.1uF  [PART]  44.49,54.62 180 bottom
C185  0.1uF  [PART]  41.32,72.26 270 top
C186  0.1uF  [PART]  36.52,75.56 0 top
C187  2.2uF  [_0402MP]  39.29,72.29 180 top
C188  2.2uF  [_0402MP]  36.29,73.07 180 top
C189  0.47uF  [PART]  36.44,71.55 180 top
C190  0.1uF  [PART]  37.81,73.69 90 bottom
C191  0.1uF  [PART]  40.61,83.21 180 top
C192  0.1uF  [PART]  39.67,81.61 0 top
C193  0.1uF  [PART]  36.49,74.26 0 top
C194  0.1uF  [PART]  40.35,82.35 180 top
C195  10uF  [_0402MP]  31.92,84.2 180 top
C196  10uF  [_0402MP]  32.94,83.36 0 top
C197  0.1uF  [PART]  34.79,72.39 180 top
C198  10pF  [PART]  31.49,75.03 45 top
C199  10pF  [PART]  32.58,76.05 225 top
C200  22pF, C0G, 5%  [PART]  30.95,80.67 180 top
C201  22pF, C0G, 5%  [PART]  30.47,76.63 90 top
C202  DNP  [PART]  31.23,76.63 90 top
C203  9pF  [PART]  34.48,84.28 270 top
C204  9pF  [PART]  39.29,83.34 270 top
C205  10nF  [PART]  34.69,71.63 0 top
C206  0.1uF  [PART]  36.49,74.26 0 bottom
C207  0.1uF  [PART]  44.49,75.16 180 bottom
C208  0.1uF  [PART]  41.32,92.8 270 top
C209  0.1uF  [PART]  36.52,96.1 0 top
C210  2.2uF  [_0402MP]  39.29,92.83 180 top
C211  2.2uF  [_0402MP]  36.29,93.61 180 top
C212  0.47uF  [PART]  36.44,92.09 180 top
C213  0.1uF  [PART]  37.81,94.23 90 bottom
C214  0.1uF  [PART]  40.61,103.75 180 top
C215  0.1uF  [PART]  39.67,102.15 0 top
C216  0.1uF  [PART]  36.49,94.8 0 top
C217  0.1uF  [PART]  40.35,102.89 180 top
C218  10uF  [_0402MP]  31.92,104.74 180 top
C219  10uF  [_0402MP]  32.94,103.9 0 top
C220  0.1uF  [PART]  34.79,92.93 180 top
C221  10pF  [PART]  31.49,95.57 45 top
C222  10pF  [PART]  32.58,96.59 225 top
C223  22pF, C0G, 5%  [PART]  30.95,101.21 180 top
C224  22pF, C0G, 5%  [PART]  30.47,97.17 90 top
C225  DNP  [PART]  31.23,97.17 90 top
C226  9pF  [PART]  34.48,104.82 270 top
C227  9pF  [PART]  39.29,103.88 270 top
C228  10nF  [PART]  34.69,92.17 0 top
C229  0.1uF  [PART]  36.49,94.8 0 bottom
C230  0.1uF  [PART]  44.49,95.7 180 bottom
C231  0.1uF  [PART]  61.86,10.64 270 top
C232  0.1uF  [PART]  57.06,13.94 0 top
C233  2.2uF  [_0402MP]  59.83,10.67 180 top
C234  2.2uF  [_0402MP]  56.83,11.45 180 top
C235  0.47uF  [PART]  56.98,9.93 180 top
C236  0.1uF  [PART]  58.35,12.07 90 bottom
C237  0.1uF  [PART]  61.15,21.59 180 top
C238  0.1uF  [PART]  60.21,19.99 0 top
C239  0.1uF  [PART]  57.03,12.64 0 top
C240  0.1uF  [PART]  60.89,20.73 180 top
C241  10uF  [_0402MP]  52.46,22.58 180 top
C242  10uF  [_0402MP]  53.48,21.74 0 top
C243  0.1uF  [PART]  55.33,10.77 180 top
C244  10pF  [PART]  52.03,13.41 45 top
C245  10pF  [PART]  53.12,14.43 225 top
C246  22pF, C0G, 5%  [PART]  51.49,19.05 180 top
C247  22pF, C0G, 5%  [PART]  51.01,15.01 90 top
C248  DNP  [PART]  51.77,15.01 90 top
C249  9pF  [PART]  55.02,22.66 270 top
C250  9pF  [PART]  59.83,21.72 270 top
C251  10nF  [PART]  55.23,10.01 0 top
C252  0.1uF  [PART]  57.03,12.64 0 bottom
C253  0.1uF  [PART]  65.03,13.54 180 bottom
C254  0.1uF  [PART]  61.86,31.18 270 top
C255  0.1uF  [PART]  57.06,34.48 0 top
C256  2.2uF  [_0402MP]  59.83,31.21 180 top
C257  2.2uF  [_0402MP]  56.83,31.99 180 top
C258  0.47uF  [PART]  56.98,30.47 180 top
C259  0.1uF  [PART]  58.35,32.61 90 bottom
C260  0.1uF  [PART]  61.15,42.13 180 top
C261  0.1uF  [PART]  60.21,40.53 0 top
C262  0.1uF  [PART]  57.03,33.18 0 top
C263  0.1uF  [PART]  60.89,41.27 180 top
C264  10uF  [_0402MP]  52.46,43.12 180 top
C265  10uF  [_0402MP]  53.48,42.28 0 top
C266  0.1uF  [PART]  55.33,31.31 180 top
C267  10pF  [PART]  52.03,33.95 45 top
C268  10pF  [PART]  53.12,34.97 225 top
C269  22pF, C0G, 5%  [PART]  51.49,39.59 180 top
C270  22pF, C0G, 5%  [PART]  51.01,35.55 90 top
C271  DNP  [PART]  51.77,35.55 90 top
C272  9pF  [PART]  55.02,43.2 270 top
C273  9pF  [PART]  59.83,42.26 270 top
C274  10nF  [PART]  55.23,30.55 0 top
C275  0.1uF  [PART]  57.03,33.18 0 bottom
C276  0.1uF  [PART]  65.03,34.08 180 bottom
C277  0.1uF  [PART]  61.86,51.72 270 top
C278  0.1uF  [PART]  57.06,55.02 0 top
C279  2.2uF  [_0402MP]  59.83,51.75 180 top
C280  2.2uF  [_0402MP]  56.83,52.53 180 top
C281  0.47uF  [PART]  56.98,51.01 180 top
C282  0.1uF  [PART]  58.35,53.15 90 bottom
C283  0.1uF  [PART]  61.15,62.67 180 top
C284  0.1uF  [PART]  60.21,61.07 0 top
C285  0.1uF  [PART]  57.03,53.72 0 top
C286  0.1uF  [PART]  60.89,61.81 180 top
C287  10uF  [_0402MP]  52.46,63.66 180 top
C288  10uF  [_0402MP]  53.48,62.82 0 top
C289  0.1uF  [PART]  55.33,51.85 180 top
C290  10pF  [PART]  52.03,54.49 45 top
C291  10pF  [PART]  53.12,55.51 225 top
C292  22pF, C0G, 5%  [PART]  51.49,60.13 180 top
C293  22pF, C0G, 5%  [PART]  51.01,56.09 90 top
C294  DNP  [PART]  51.77,56.09 90 top
C295  9pF  [PART]  55.02,63.74 270 top
C296  9pF  [PART]  59.83,62.8 270 top
C297  10nF  [PART]  55.23,51.09 0 top
C298  0.1uF  [PART]  57.03,53.72 0 bottom
C299  0.1uF  [PART]  65.03,54.62 180 bottom
C300  0.1uF  [PART]  61.86,72.26 270 top
C301  0.1uF  [PART]  57.06,75.56 0 top
C302  2.2uF  [_0402MP]  59.83,72.29 180 top
C303  2.2uF  [_0402MP]  56.83,73.07 180 top
C304  0.47uF  [PART]  56.98,71.55 180 top
C305  0.1uF  [PART]  58.35,73.69 90 bottom
C306  0.1uF  [PART]  61.15,83.21 180 top
C307  0.1uF  [PART]  60.21,81.61 0 top
C308  0.1uF  [PART]  57.03,74.26 0 top
C309  0.1uF  [PART]  60.89,82.35 180 top
C310  10uF  [_0402MP]  52.46,84.2 180 top
C311  10uF  [_0402MP]  53.48,83.36 0 top
C312  0.1uF  [PART]  55.33,72.39 180 top
C313  10pF  [PART]  52.03,75.03 45 top
C314  10pF  [PART]  53.12,76.05 225 top
C315  22pF, C0G, 5%  [PART]  51.49,80.67 180 top
C316  22pF, C0G, 5%  [PART]  51.01,76.63 90 top
C317  DNP  [PART]  51.77,76.63 90 top
C318  9pF  [PART]  55.02,84.28 270 top
C319  9pF  [PART]  59.83,83.34 270 top
C320  10nF  [PART]  55.23,71.63 0 top
C321  0.1uF  [PART]  57.03,74.26 0 bottom
C322  0.1uF  [PART]  65.03,75.16 180 bottom
C323  0.1uF  [PART]  61.86,92.8 270 top
C324  0.1uF  [PART]  57.06,96.1 0 top
C325  2.2uF  [_0402MP]  59.83,92.83 180 top
C326  2.2uF  [_0402MP]  56.83,93.61 180 top
C327  0.47uF  [PART]  56.98,92.09 180 top
C328  0.1uF  [PART]  58.35,94.23 90 bottom
C329  0.1uF  [PART]  61.15,103.75 180 top
C330  0.1uF  [PART]  60.21,102.15 0 top
C331  0.1uF  [PART]  57.03,94.8 0 top
C332  0.1uF  [PART]  60.89,102.89 180 top
C333  10uF  [_0402MP]  52.46,104.74 180 top
C334  10uF  [_0402MP]  53.48,103.9 0 top
C335  0.1uF  [PART]  55.33,92.93 180 top
C336  10pF  [PART]  52.03,95.57 45 top
C337  10pF  [PART]  53.12,96.59 225 top
C338  22pF, C0G, 5%  [PART]  51.49,101.21 180 top
C339  22pF, C0G, 5%  [PART]  51.01,97.17 90 top
C340  DNP  [PART]  51.77,97.17 90 top
C341  9pF  [PART]  55.02,104.82 270 top
C342  9pF  [PART]  59.83,103.88 270 top
C343  10nF  [PART]  55.23,92.17 0 top
C344  0.1uF  [PART]  57.03,94.8 0 bottom
C345  0.1uF  [PART]  65.03,95.7 180 bottom
C346  0.1uF  [PART]  82.4,10.64 270 top
C347  0.1uF  [PART]  77.6,13.94 0 top
C348  2.2uF  [_0402MP]  80.37,10.67 180 top
C349  2.2uF  [_0402MP]  77.37,11.45 180 top
C350  0.47uF  [PART]  77.52,9.93 180 top
C351  0.1uF  [PART]  78.89,12.07 90 bottom
C352  0.1uF  [PART]  81.69,21.59 180 top
C353  0.1uF  [PART]  80.75,19.99 0 top
C354  0.1uF  [PART]  77.57,12.64 0 top
C355  0.1uF  [PART]  81.43,20.73 180 top
C356  10uF  [_0402MP]  73,22.58 180 top
C357  10uF  [_0402MP]  74.02,21.74 0 top
C358  0.1uF  [PART]  75.87,10.77 180 top
C359  10pF  [PART]  72.57,13.41 45 top
C360  10pF  [PART]  73.66,14.43 225 top
C361  22pF, C0G, 5%  [PART]  72.03,19.05 180 top
C362  22pF, C0G, 5%  [PART]  71.55,15.01 90 top
C363  DNP  [PART]  72.31,15.01 90 top
C364  9pF  [PART]  75.56,22.66 270 top
C365  9pF  [PART]  80.37,21.72 270 top
C366  10nF  [PART]  75.77,10.01 0 top
C367  0.1uF  [PART]  77.57,12.64 0 bottom
C368  0.1uF  [PART]  85.57,13.54 180 bottom
C369  0.1uF  [PART]  82.4,31.18 270 top
C370  0.1uF  [PART]  77.6,34.48 0 top
C371  2.2uF  [_0402MP]  80.37,31.21 180 top
C372  2.2uF  [_0402MP]  77.37,31.99 180 top
C373  0.47uF  [PART]  77.52,30.47 180 top
C374  0.1uF  [PART]  78.89,32.61 90 bottom
C375  0.1uF  [PART]  81.69,42.13 180 top
C376  0.1uF  [PART]  80.75,40.53 0 top
C377  0.1uF  [PART]  77.57,33.18 0 top
C378  0.1uF  [PART]  81.43,41.27 180 top
C379  10uF  [_0402MP]  73,43.12 180 top
C380  10uF  [_0402MP]  74.02,42.28 0 top
C381  0.1uF  [PART]  75.87,31.31 180 top
C382  10pF  [PART]  72.57,33.95 45 top
C383  10pF  [PART]  73.66,34.97 225 top
C384  22pF, C0G, 5%  [PART]  72.03,39.59 180 top
C385  22pF, C0G, 5%  [PART]  71.55,35.55 90 top
C386  DNP  [PART]  72.31,35.55 90 top
C387  9pF  [PART]  75.56,43.2 270 top
C388  9pF  [PART]  80.37,42.26 270 top
C389  10nF  [PART]  75.77,30.55 0 top
C390  0.1uF  [PART]  77.57,33.18 0 bottom
C391  0.1uF  [PART]  85.57,34.08 180 bottom
C392  0.1uF  [PART]  82.4,51.72 270 top
C393  0.1uF  [PART]  77.6,55.02 0 top
C394  2.2uF  [_0402MP]  80.37,51.75 180 top
C395  2.2uF  [_0402MP]  77.37,52.53 180 top
C396  0.47uF  [PART]  77.52,51.01 180 top
C397  0.1uF  [PART]  78.89,53.15 90 bottom
C398  0.1uF  [PART]  81.69,62.67 180 top
C399  0.1uF  [PART]  80.75,61.07 0 top
C400  0.1uF  [PART]  77.57,53.72 0 top
C401  0.1uF  [PART]  81.43,61.81 180 top
C402  10uF  [_0402MP]  73,63.66 180 top
C403  10uF  [_0402MP]  74.02,62.82 0 top
C404  0.1uF  [PART]  75.87,51.85 180 top
C405  10pF  [PART]  72.57,54.49 45 top
C406  10pF  [PART]  73.66,55.51 225 top
C407  22pF, C0G, 5%  [PART]  72.03,60.13 180 top
C408  22pF, C0G, 5%  [PART]  71.55,56.09 90 top
C409  DNP  [PART]  72.31,56.09 90 top
C410  9pF  [PART]  75.56,63.74 270 top
C411  9pF  [PART]  80.37,62.8 270 top
C412  10nF  [PART]  75.77,51.09 0 top
C413  0.1uF  [PART]  77.57,53.72 0 bottom
C414  0.1uF  [PART]  85.57,54.62 180 bottom
C415  0.1uF  [PART]  82.4,72.26 270 top
C416  0.1uF  [PART]  77.6,75.56 0 top
C417  2.2uF  [_0402MP]  80.37,72.29 180 top
C418  2.2uF  [_0402MP]  77.37,73.07 180 top
C419  0.47uF  [PART]  77.52,71.55 180 top
C420  0.1uF  [PART]  78.89,73.69 90 bottom
C421  0.1uF  [PART]  81.69,83.21 180 top
C422  0.1uF  [PART]  80.75,81.61 0 top
C423  0.1uF  [PART]  77.57,74.26 0 top
C424  0.1uF  [PART]  81.43,82.35 180 top
C425  10uF  [_0402MP]  73,84.2 180 top
C426  10uF  [_0402MP]  74.02,83.36 0 top
C427  0.1uF  [PART]  75.87,72.39 180 top
C428  10pF  [PART]  72.57,75.03 45 top
C429  10pF  [PART]  73.66,76.05 225 top
C430  22pF, C0G, 5%  [PART]  72.03,80.67 180 top
C431  22pF, C0G, 5%  [PART]  71.55,76.63 90 top
C432  DNP  [PART]  72.31,76.63 90 top
C433  9pF  [PART]  75.56,84.28 270 top
C434  9pF  [PART]  80.37,83.34 270 top
C435  10nF  [PART]  75.77,71.63 0 top
C436  0.1uF  [PART]  77.57,74.26 0 bottom
C437  0.1uF  [PART]  85.57,75.16 180 bottom
C438  0.1uF  [PART]  82.4,92.8 270 top
C439  0.1uF  [PART]  77.6,96.1 0 top
C440  2.2uF  [_0402MP]  80.37,92.83 180 top
C441  2.2uF  [_0402MP]  77.37,93.61 180 top
C442  0.47uF  [PART]  77.52,92.09 180 top
C443  0.1uF  [PART]  78.89,94.23 90 bottom
C444  0.1uF  [PART]  81.69,103.75 180 top
C445  0.1uF  [PART]  80.75,102.15 0 top
C446  0.1uF  [PART]  77.57,94.8 0 top
C447  0.1uF  [PART]  81.43,102.89 180 top
C448  10uF  [_0402MP]  73,104.74 180 top
C449  10uF  [_0402MP]  74.02,103.9 0 top
C450  0.1uF  [PART]  75.87,92.93 180 top
C451  10pF  [PART]  72.57,95.57 45 top
C452  10pF  [PART]  73.66,96.59 225 top
C453  22pF, C0G, 5%  [PART]  72.03,101.21 180 top
C454  22pF, C0G, 5%  [PART]  71.55,97.17 90 top
C455  DNP  [PART]  72.31,97.17 90 top
C456  9pF  [PART]  75.56,104.82 270 top
C457  9pF  [PART]  80.37,103.88 270 top
C458  10nF  [PART]  75.77,92.17 0 top
C459  0.1uF  [PART]  77.57,94.8 0 bottom
C460  0.1uF  [PART]  85.57,95.7 180 bottom
C461  0.1uF  [PART]  102.94,10.64 270 top
C462  0.1uF  [PART]  98.14,13.94 0 top
C463  2.2uF  [_0402MP]  100.91,10.67 180 top
C464  2.2uF  [_0402MP]  97.91,11.45 180 top
C465  0.47uF  [PART]  98.06,9.93 180 top
C466  0.1uF  [PART]  99.43,12.07 90 bottom
C467  0.1uF  [PART]  102.23,21.59 180 top
C468  0.1uF  [PART]  101.29,19.99 0 top
C469  0.1uF  [PART]  98.11,12.64 0 top
C470  0.1uF  [PART]  101.97,20.73 180 top
C471  10uF  [_0402MP]  93.54,22.58 180 top
C472  10uF  [_0402MP]  94.56,21.74 0 top
C473  0.1uF  [PART]  96.41,10.77 180 top
C474  10pF  [PART]  93.11,13.41 45 top
C475  10pF  [PART]  94.2,14.43 225 top
C476  22pF, C0G, 5%  [PART]  92.57,19.05 180 top
C477  22pF, C0G, 5%  [PART]  92.09,15.01 90 top
C478  DNP  [PART]  92.85,15.01 90 top
C479  9pF  [PART]  96.1,22.66 270 top
C480  9pF  [PART]  100.91,21.72 270 top
C481  10nF  [PART]  96.31,10.01 0 top
C482  0.1uF  [PART]  98.11,12.64 0 bottom
C483  0.1uF  [PART]  106.11,13.54 180 bottom
C484  0.1uF  [PART]  102.94,31.18 270 top
C485  0.1uF  [PART]  98.14,34.48 0 top
C486  2.2uF  [_0402MP]  100.91,31.21 180 top
C487  2.2uF  [_0402MP]  97.91,31.99 180 top
C488  0.47uF  [PART]  98.06,30.47 180 top
C489  0.1uF  [PART]  99.43,32.61 90 bottom
C490  0.1uF  [PART]  102.23,42.13 180 top
C491  0.1uF  [PART]  101.29,40.53 0 top
C492  0.1uF  [PART]  98.11,33.18 0 top
C493  0.1uF  [PART]  101.97,41.27 180 top
C494  10uF  [_0402MP]  93.54,43.12 180 top
C495  10uF  [_0402MP]  94.56,42.28 0 top
C496  0.1uF  [PART]  96.41,31.31 180 top
C497  10pF  [PART]  93.11,33.95 45 top
C498  10pF  [PART]  94.2,34.97 225 top
C499  22pF, C0G, 5%  [PART]  92.57,39.59 180 top
C500  22pF, C0G, 5%  [PART]  92.09,35.55 90 top
C501  DNP  [PART]  92.85,35.55 90 top
C502  9pF  [PART]  96.1,43.2 270 top
C503  9pF  [PART]  100.91,42.26 270 top
C504  10nF  [PART]  96.31,30.55 0 top
C505  0.1uF  [PART]  98.11,33.18 0 bottom
C506  0.1uF  [PART]  106.11,34.08 180 bottom
C507  0.1uF  [PART]  102.94,51.72 270 top
C508  0.1uF  [PART]  98.14,55.02 0 top
C509  2.2uF  [_0402MP]  100.91,51.75 180 top
C510  2.2uF  [_0402MP]  97.91,52.53 180 top
C511  0.47uF  [PART]  98.06,51.01 180 top
C512  0.1uF  [PART]  99.43,53.15 90 bottom
C513  0.1uF  [PART]  102.23,62.67 180 top
C514  0.1uF  [PART]  101.29,61.07 0 top
C515  0.1uF  [PART]  98.11,53.72 0 top
C516  0.1uF  [PART]  101.97,61.81 180 top
C517  10uF  [_0402MP]  93.54,63.66 180 top
C518  10uF  [_0402MP]  94.56,62.82 0 top
C519  0.1uF  [PART]  96.41,51.85 180 top
C520  10pF  [PART]  93.11,54.49 45 top
C521  10pF  [PART]  94.2,55.51 225 top
C522  22pF, C0G, 5%  [PART]  92.57,60.13 180 top
C523  22pF, C0G, 5%  [PART]  92.09,56.09 90 top
C524  DNP  [PART]  92.85,56.09 90 top
C525  9pF  [PART]  96.1,63.74 270 top
C526  9pF  [PART]  100.91,62.8 270 top
C527  10nF  [PART]  96.31,51.09 0 top
C528  0.1uF  [PART]  98.11,53.72 0 bottom
C529  0.1uF  [PART]  106.11,54.62 180 bottom
C530  0.1uF  [PART]  102.94,72.26 270 top
C531  0.1uF  [PART]  98.14,75.56 0 top
C532  2.2uF  [_0402MP]  100.91,72.29 180 top
C533  2.2uF  [_0402MP]  97.91,73.07 180 top
C534  0.47uF  [PART]  98.06,71.55 180 top
C535  0.1uF  [PART]  99.43,73.69 90 bottom
C536  0.1uF  [PART]  102.23,83.21 180 top
C537  0.1uF  [PART]  101.29,81.61 0 top
C538  0.1uF  [PART]  98.11,74.26 0 top
C539  0.1uF  [PART]  101.97,82.35 180 top
C540  10uF  [_0402MP]  93.54,84.2 180 top
C541  10uF  [_0402MP]  94.56,83.36 0 top
C542  0.1uF  [PART]  96.41,72.39 180 top
C543  10pF  [PART]  93.11,75.03 45 top
C544  10pF  [PART]  94.2,76.05 225 top